# Altium PCB egg.PcbDoc (part 1 of 3)
Units mil, origin at the board's own origin, x right, y up, seen from the top; angles counter-clockwise.
Board outline 3110.24 x 2637.8 mil, 4 copper layers (Top Layer, GND, PWR, Bottom Layer), stack 30.634 mil thick; 262 components, 132 nets, 710 pads, 642 vias.
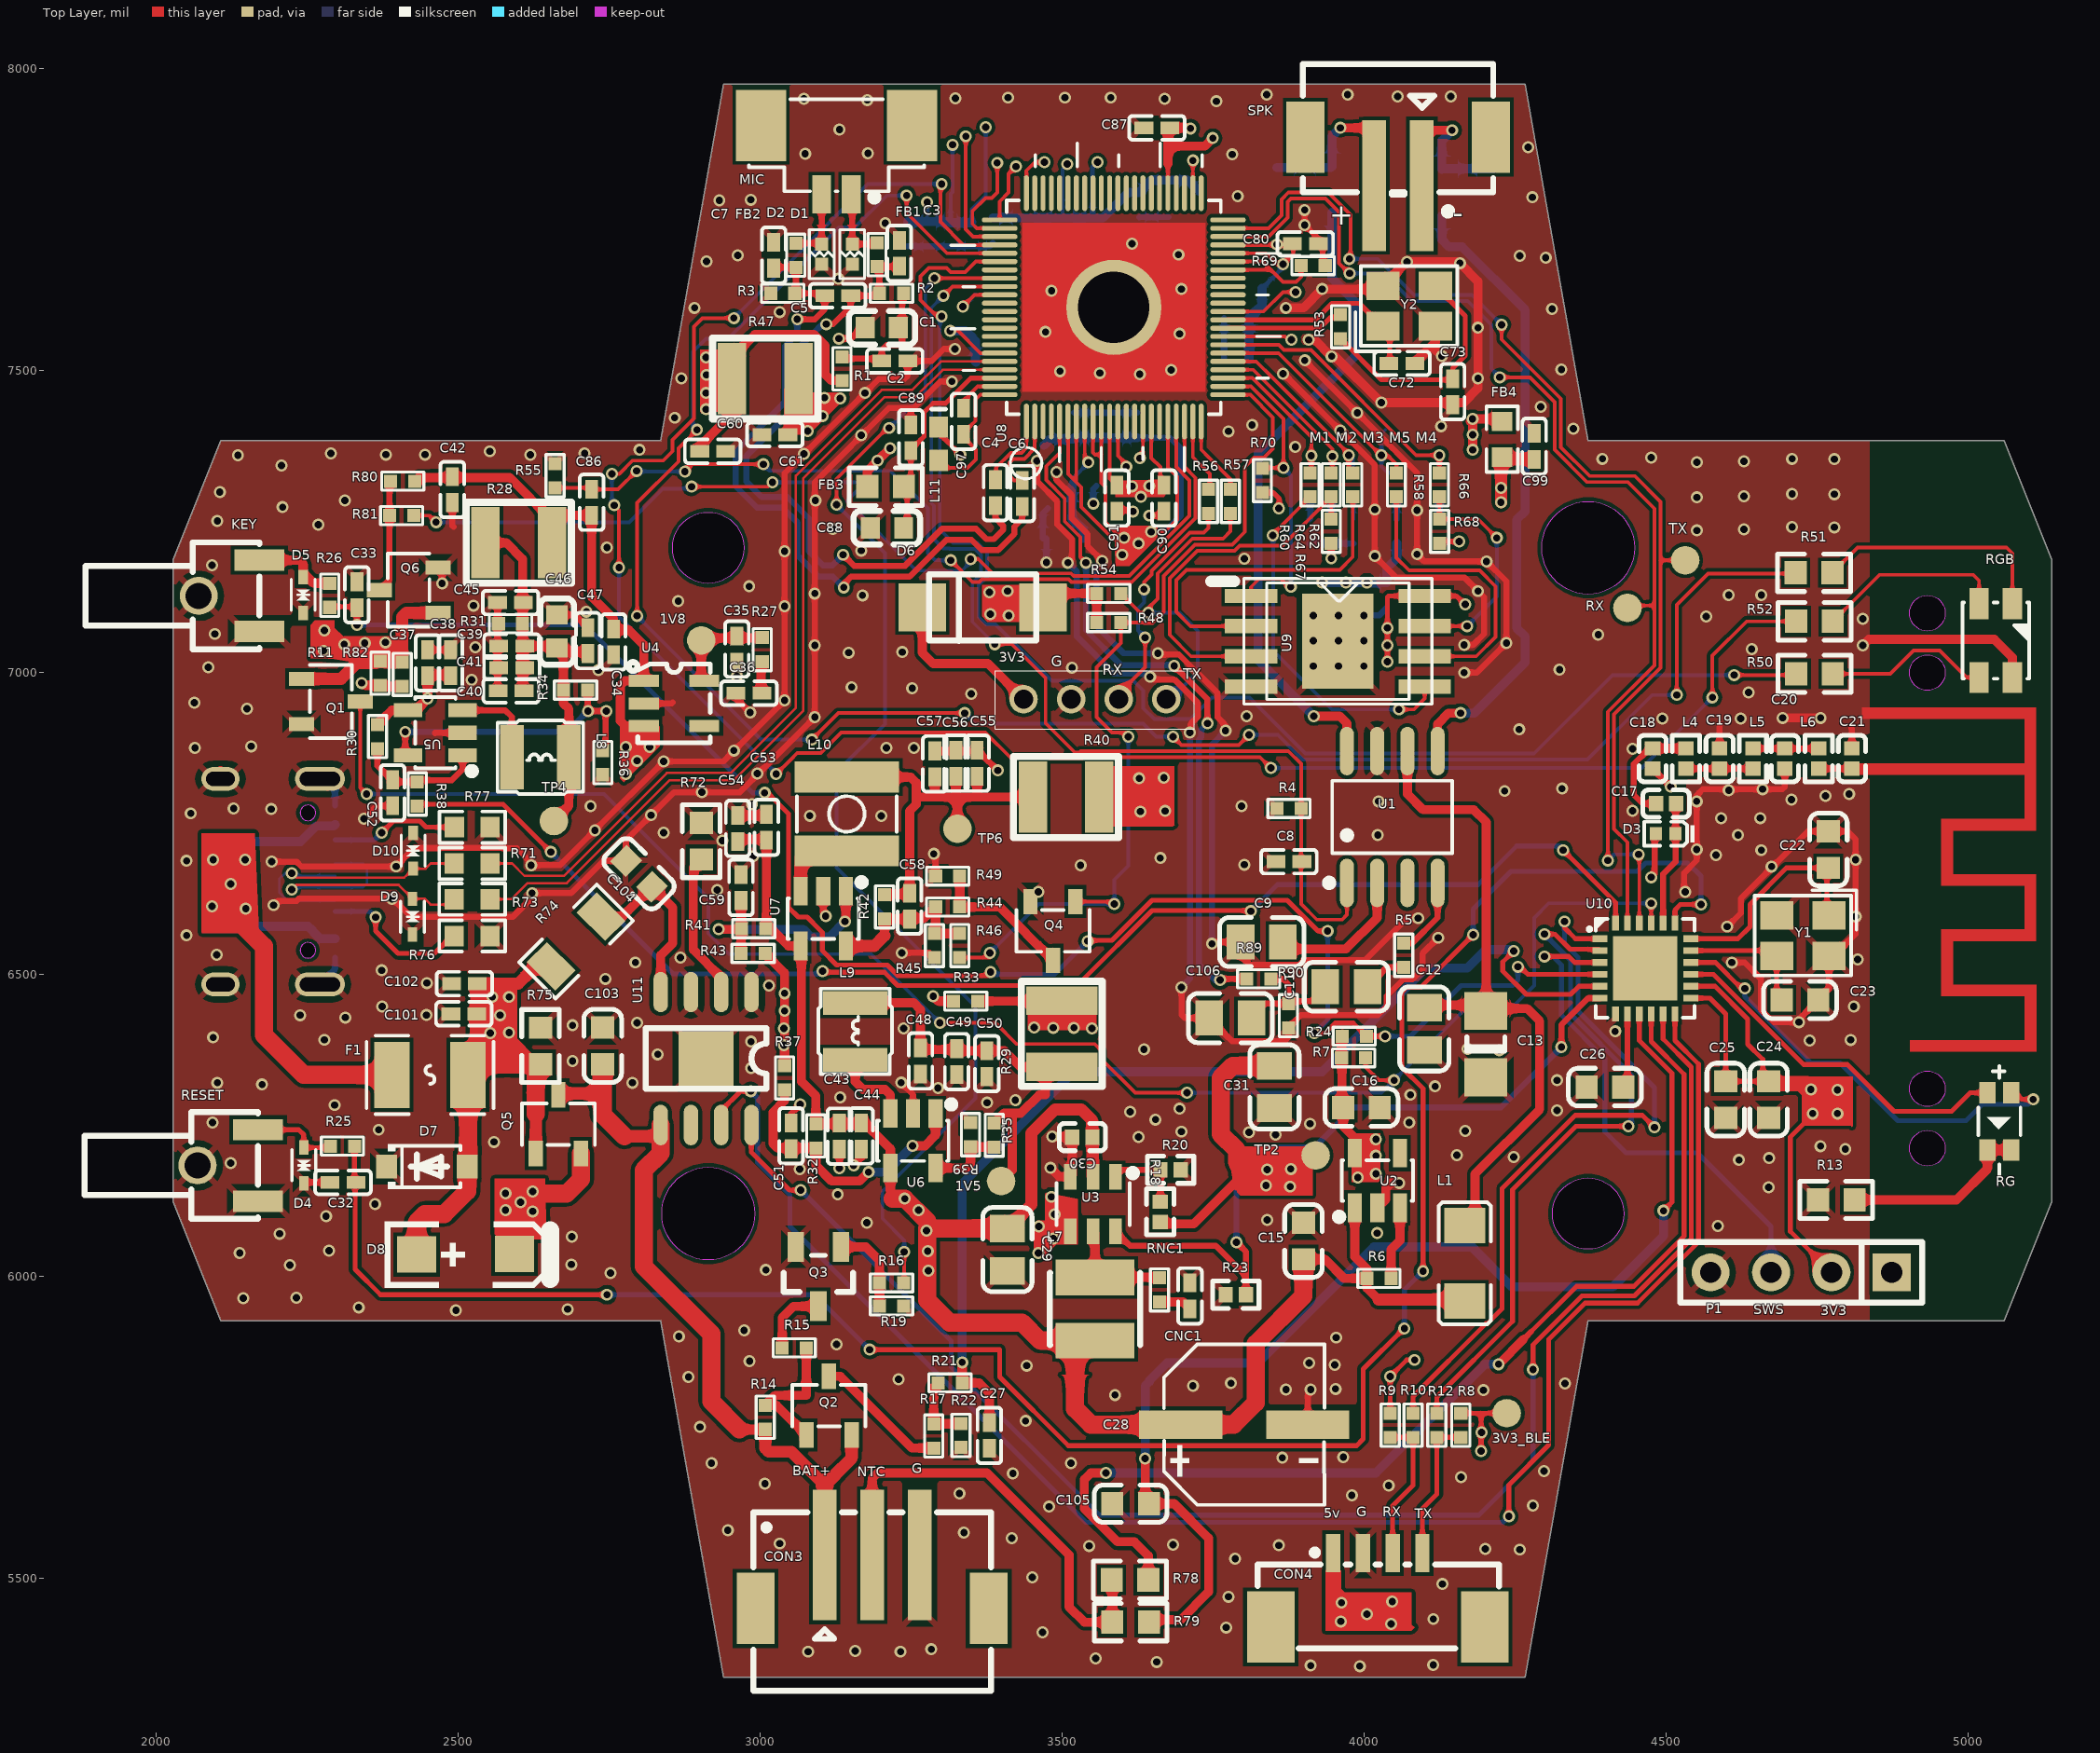
[diagram p0: Top Layer view]
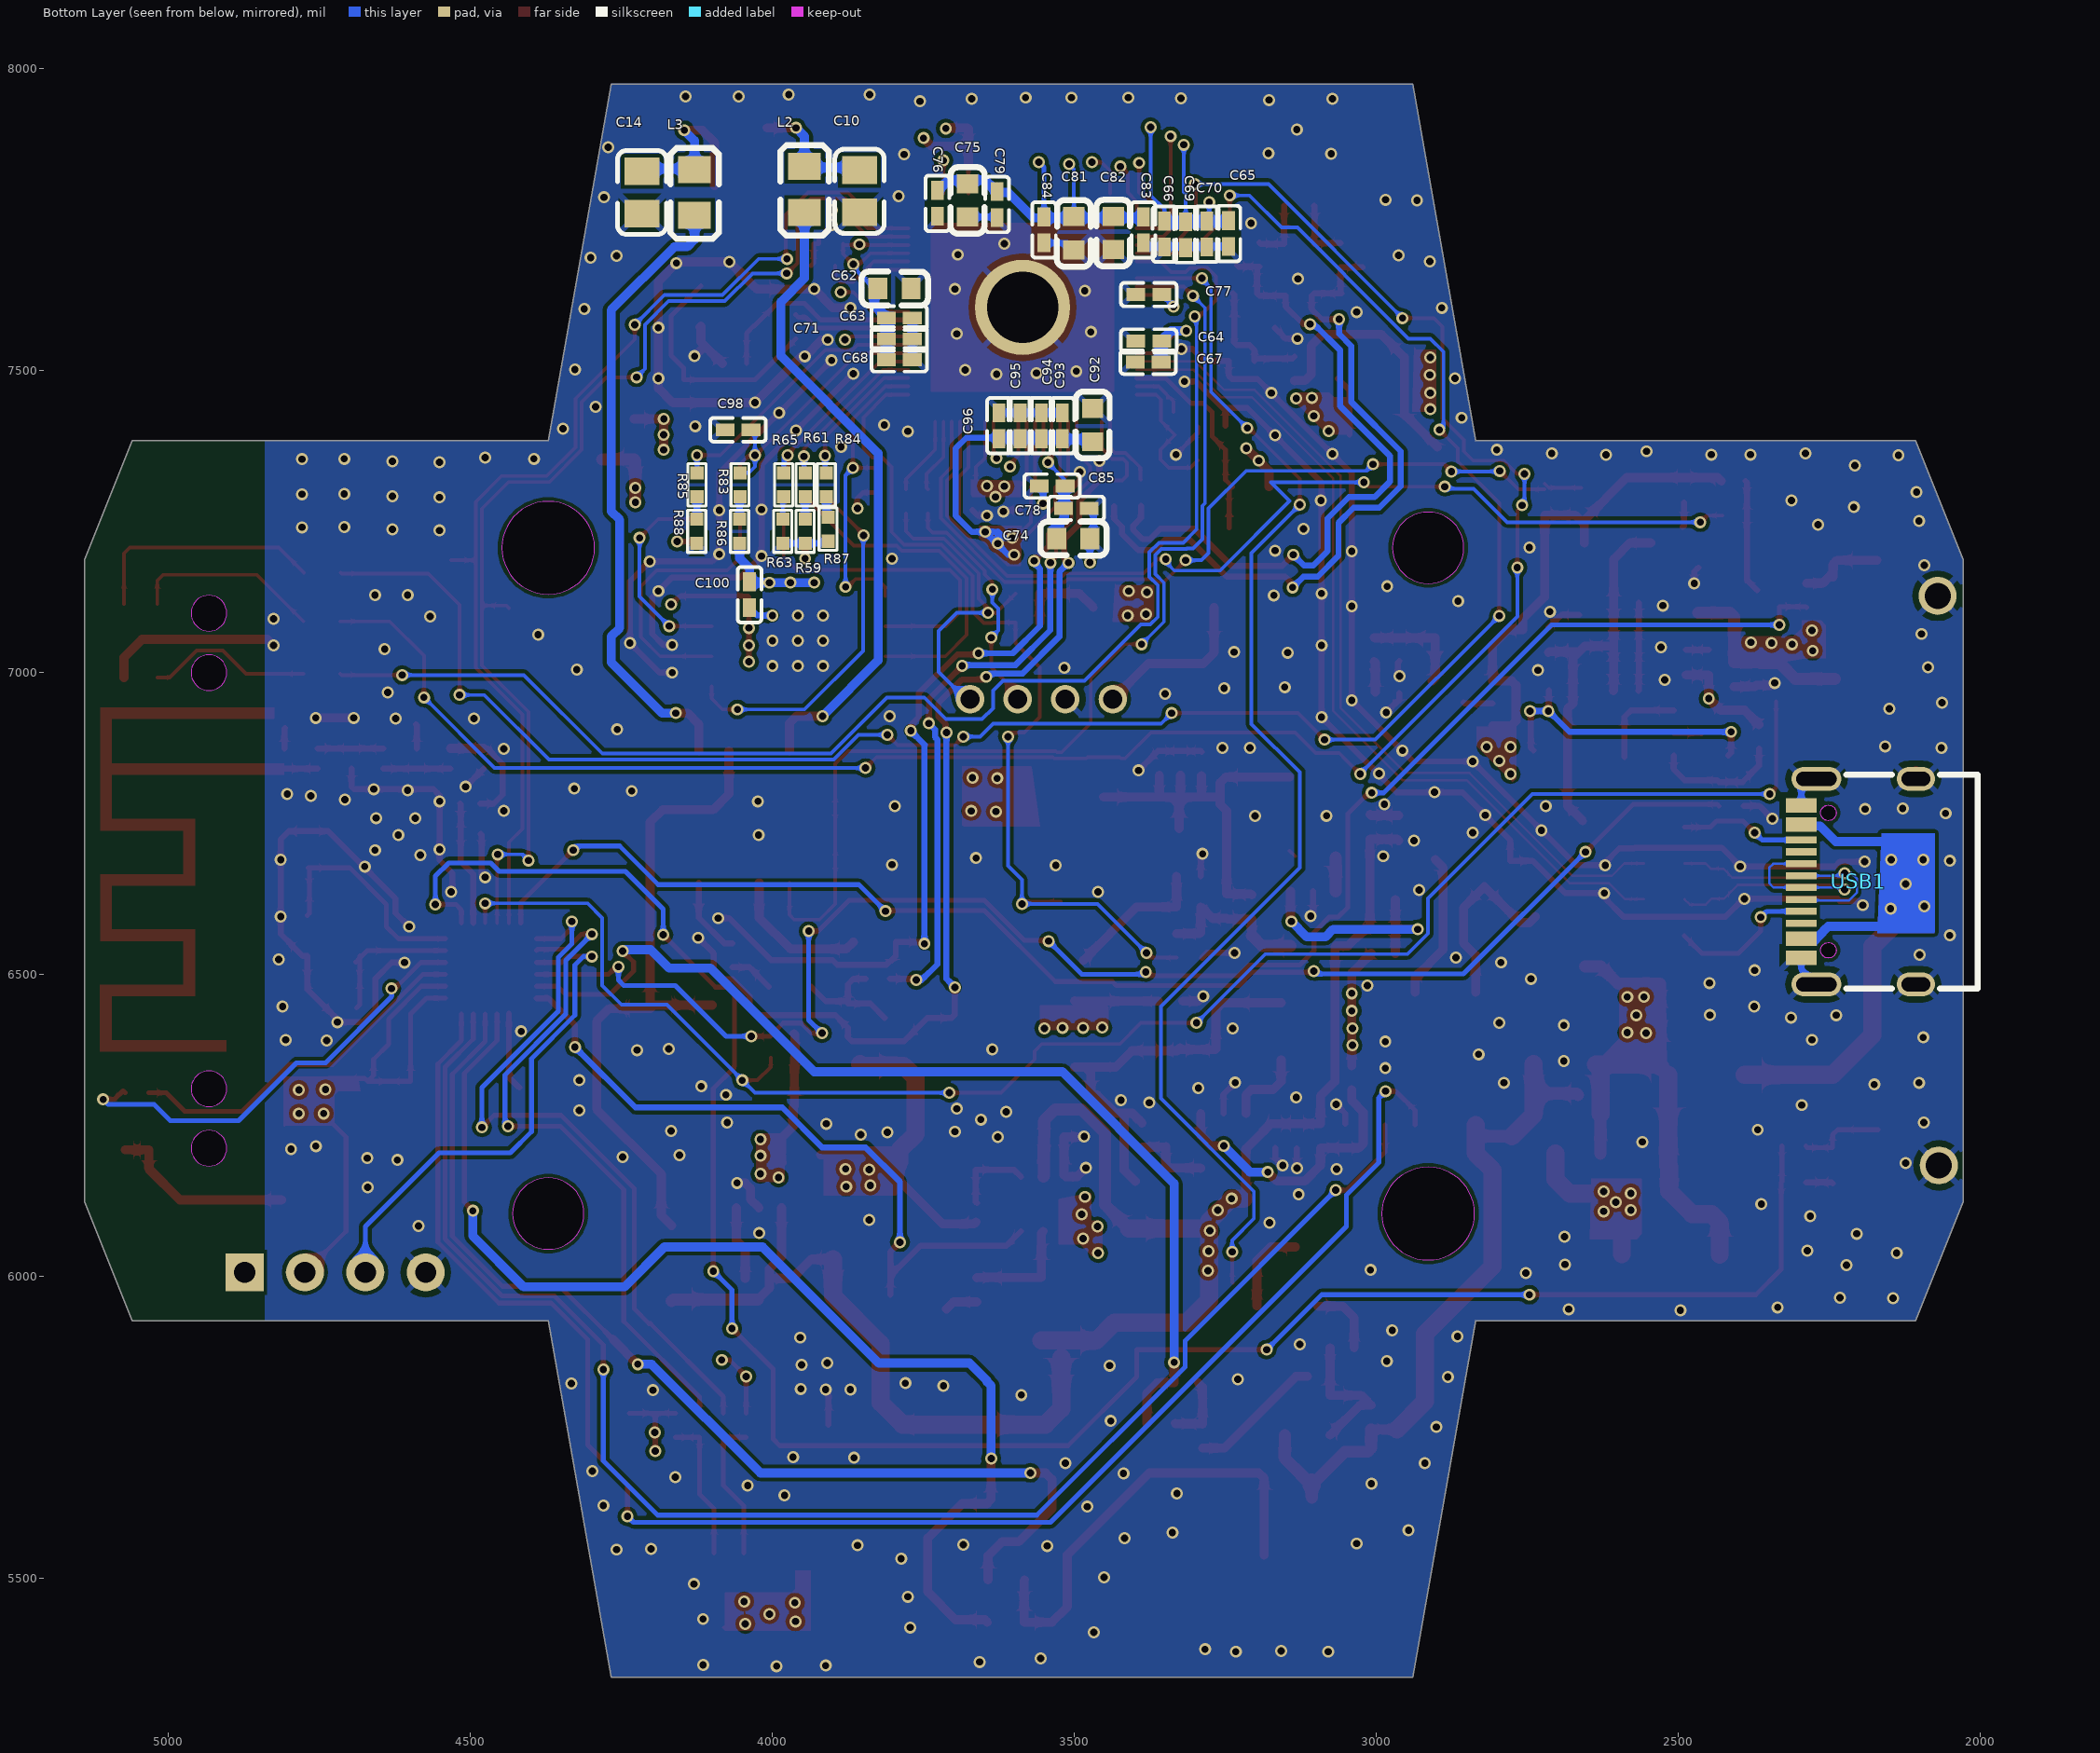
[diagram p1: Bottom Layer view, seen from below]
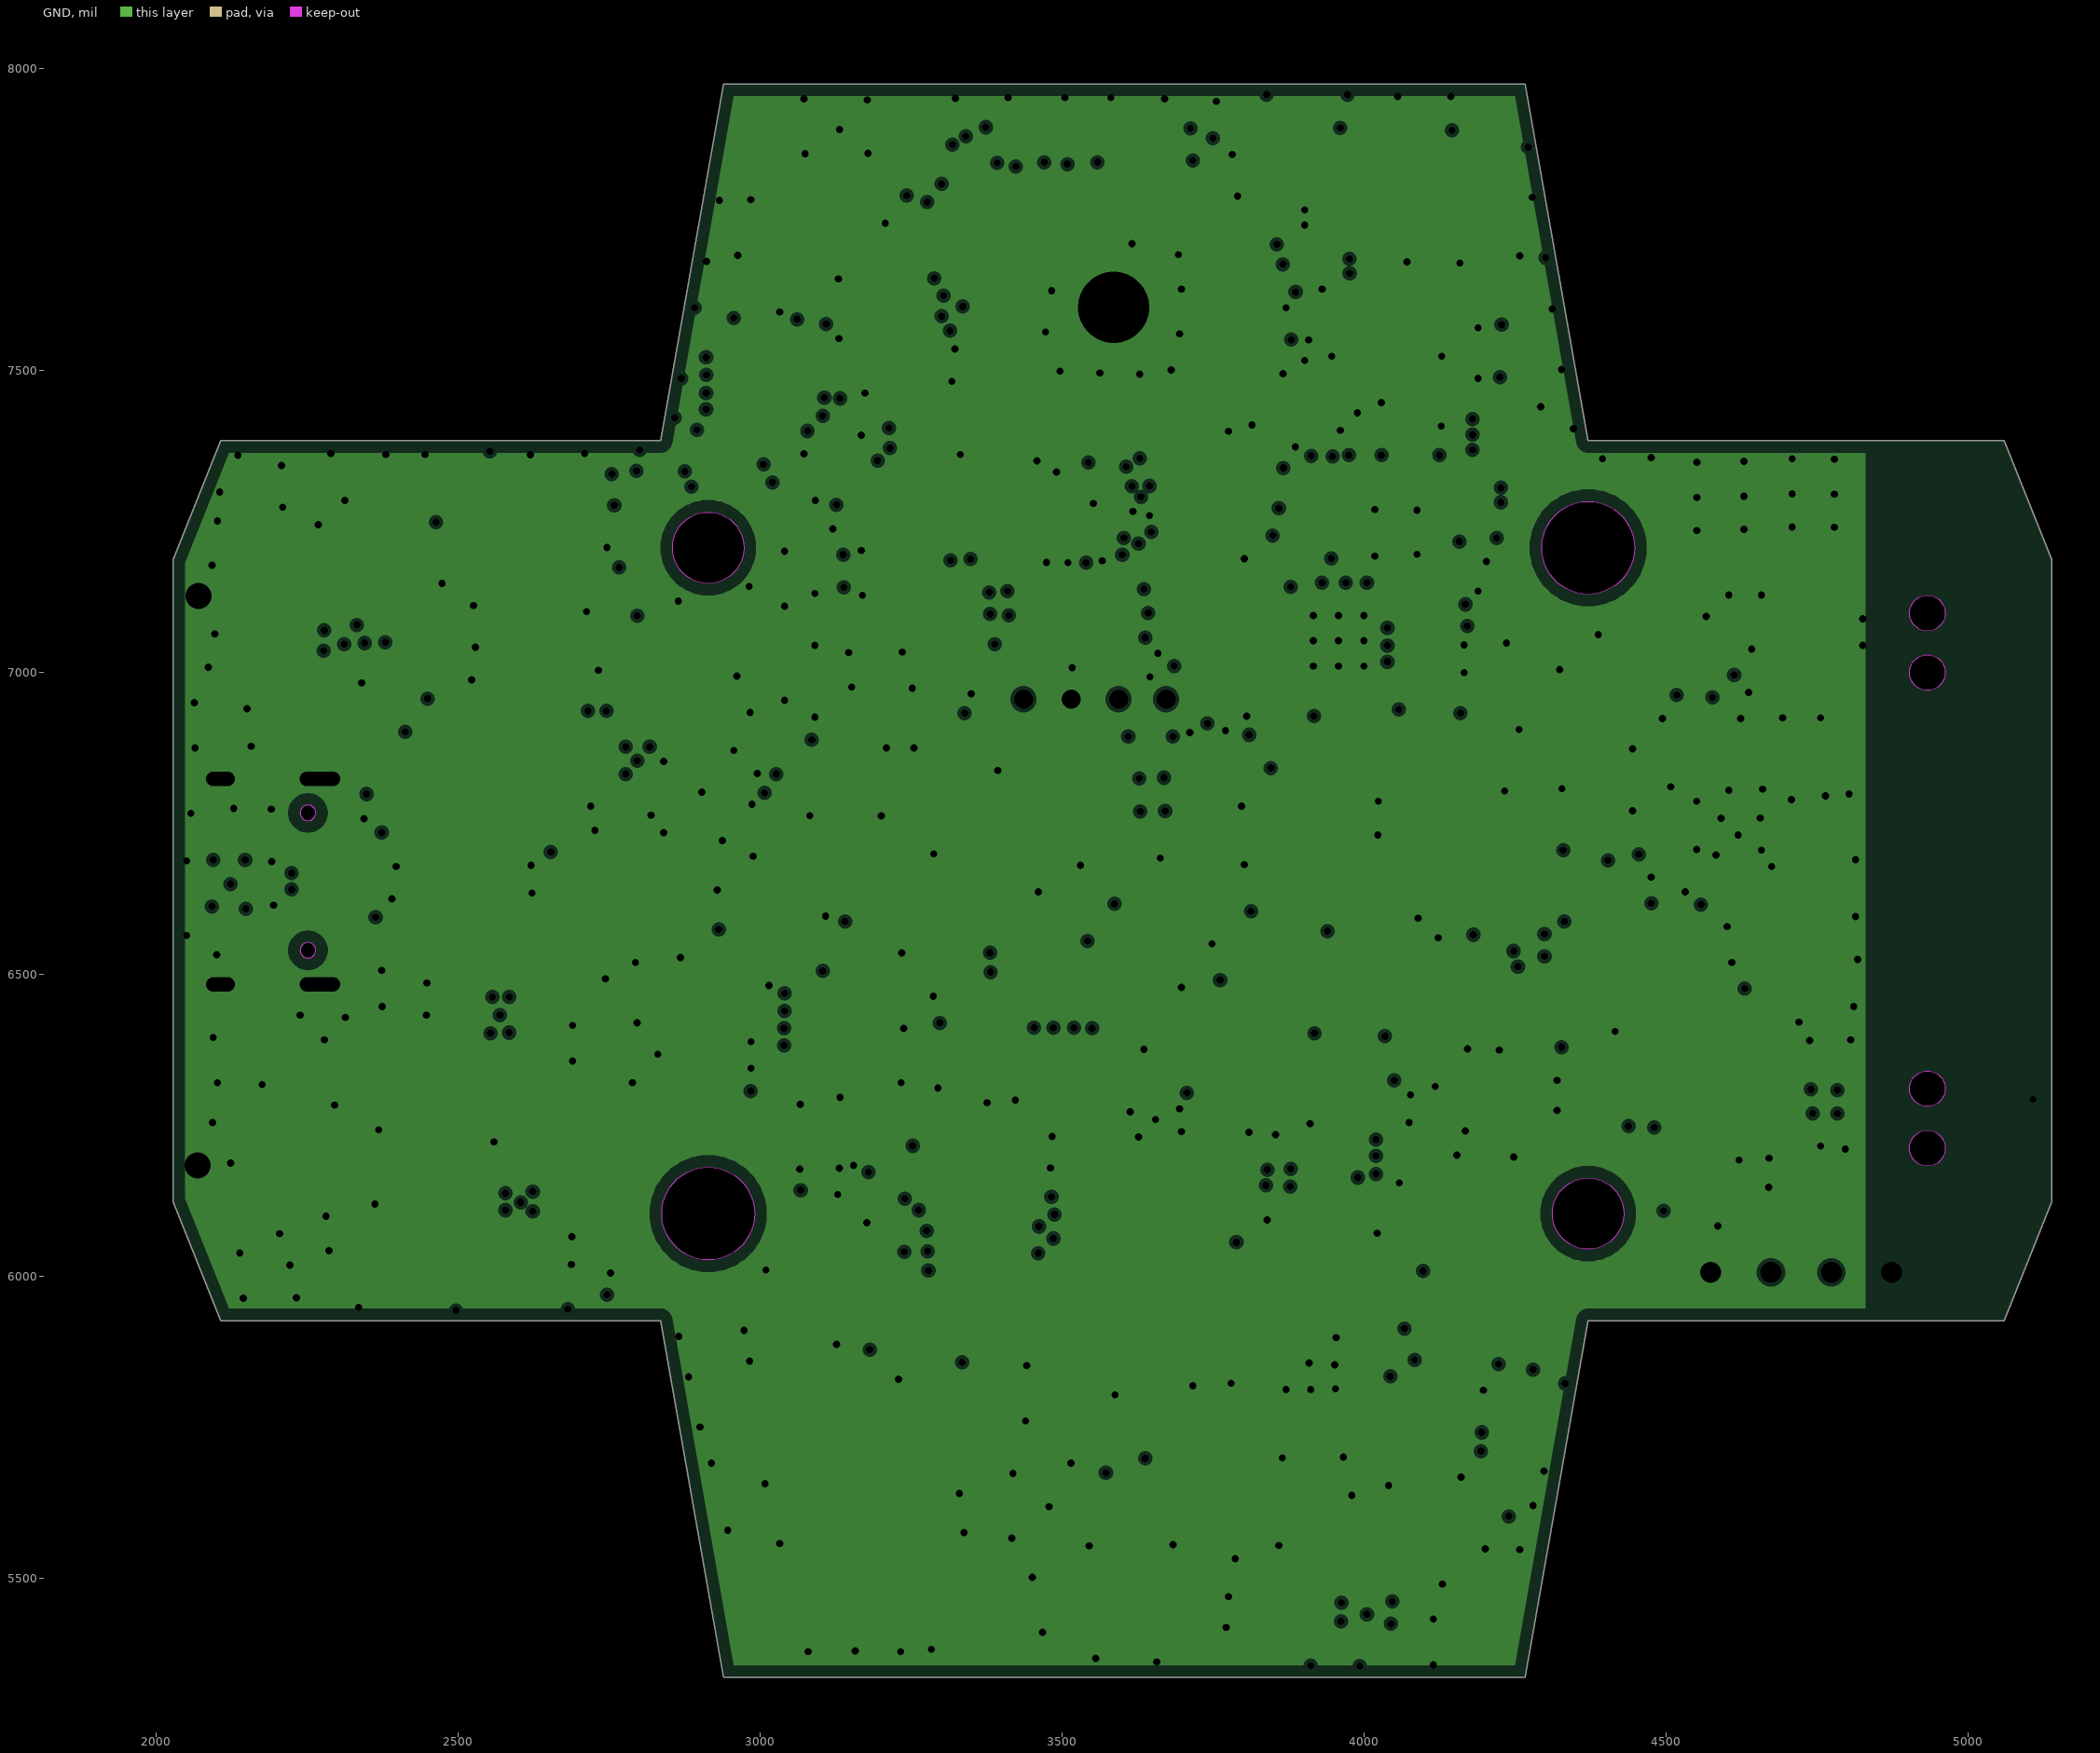
[diagram p2: GND, clearances drawn from the general rule]
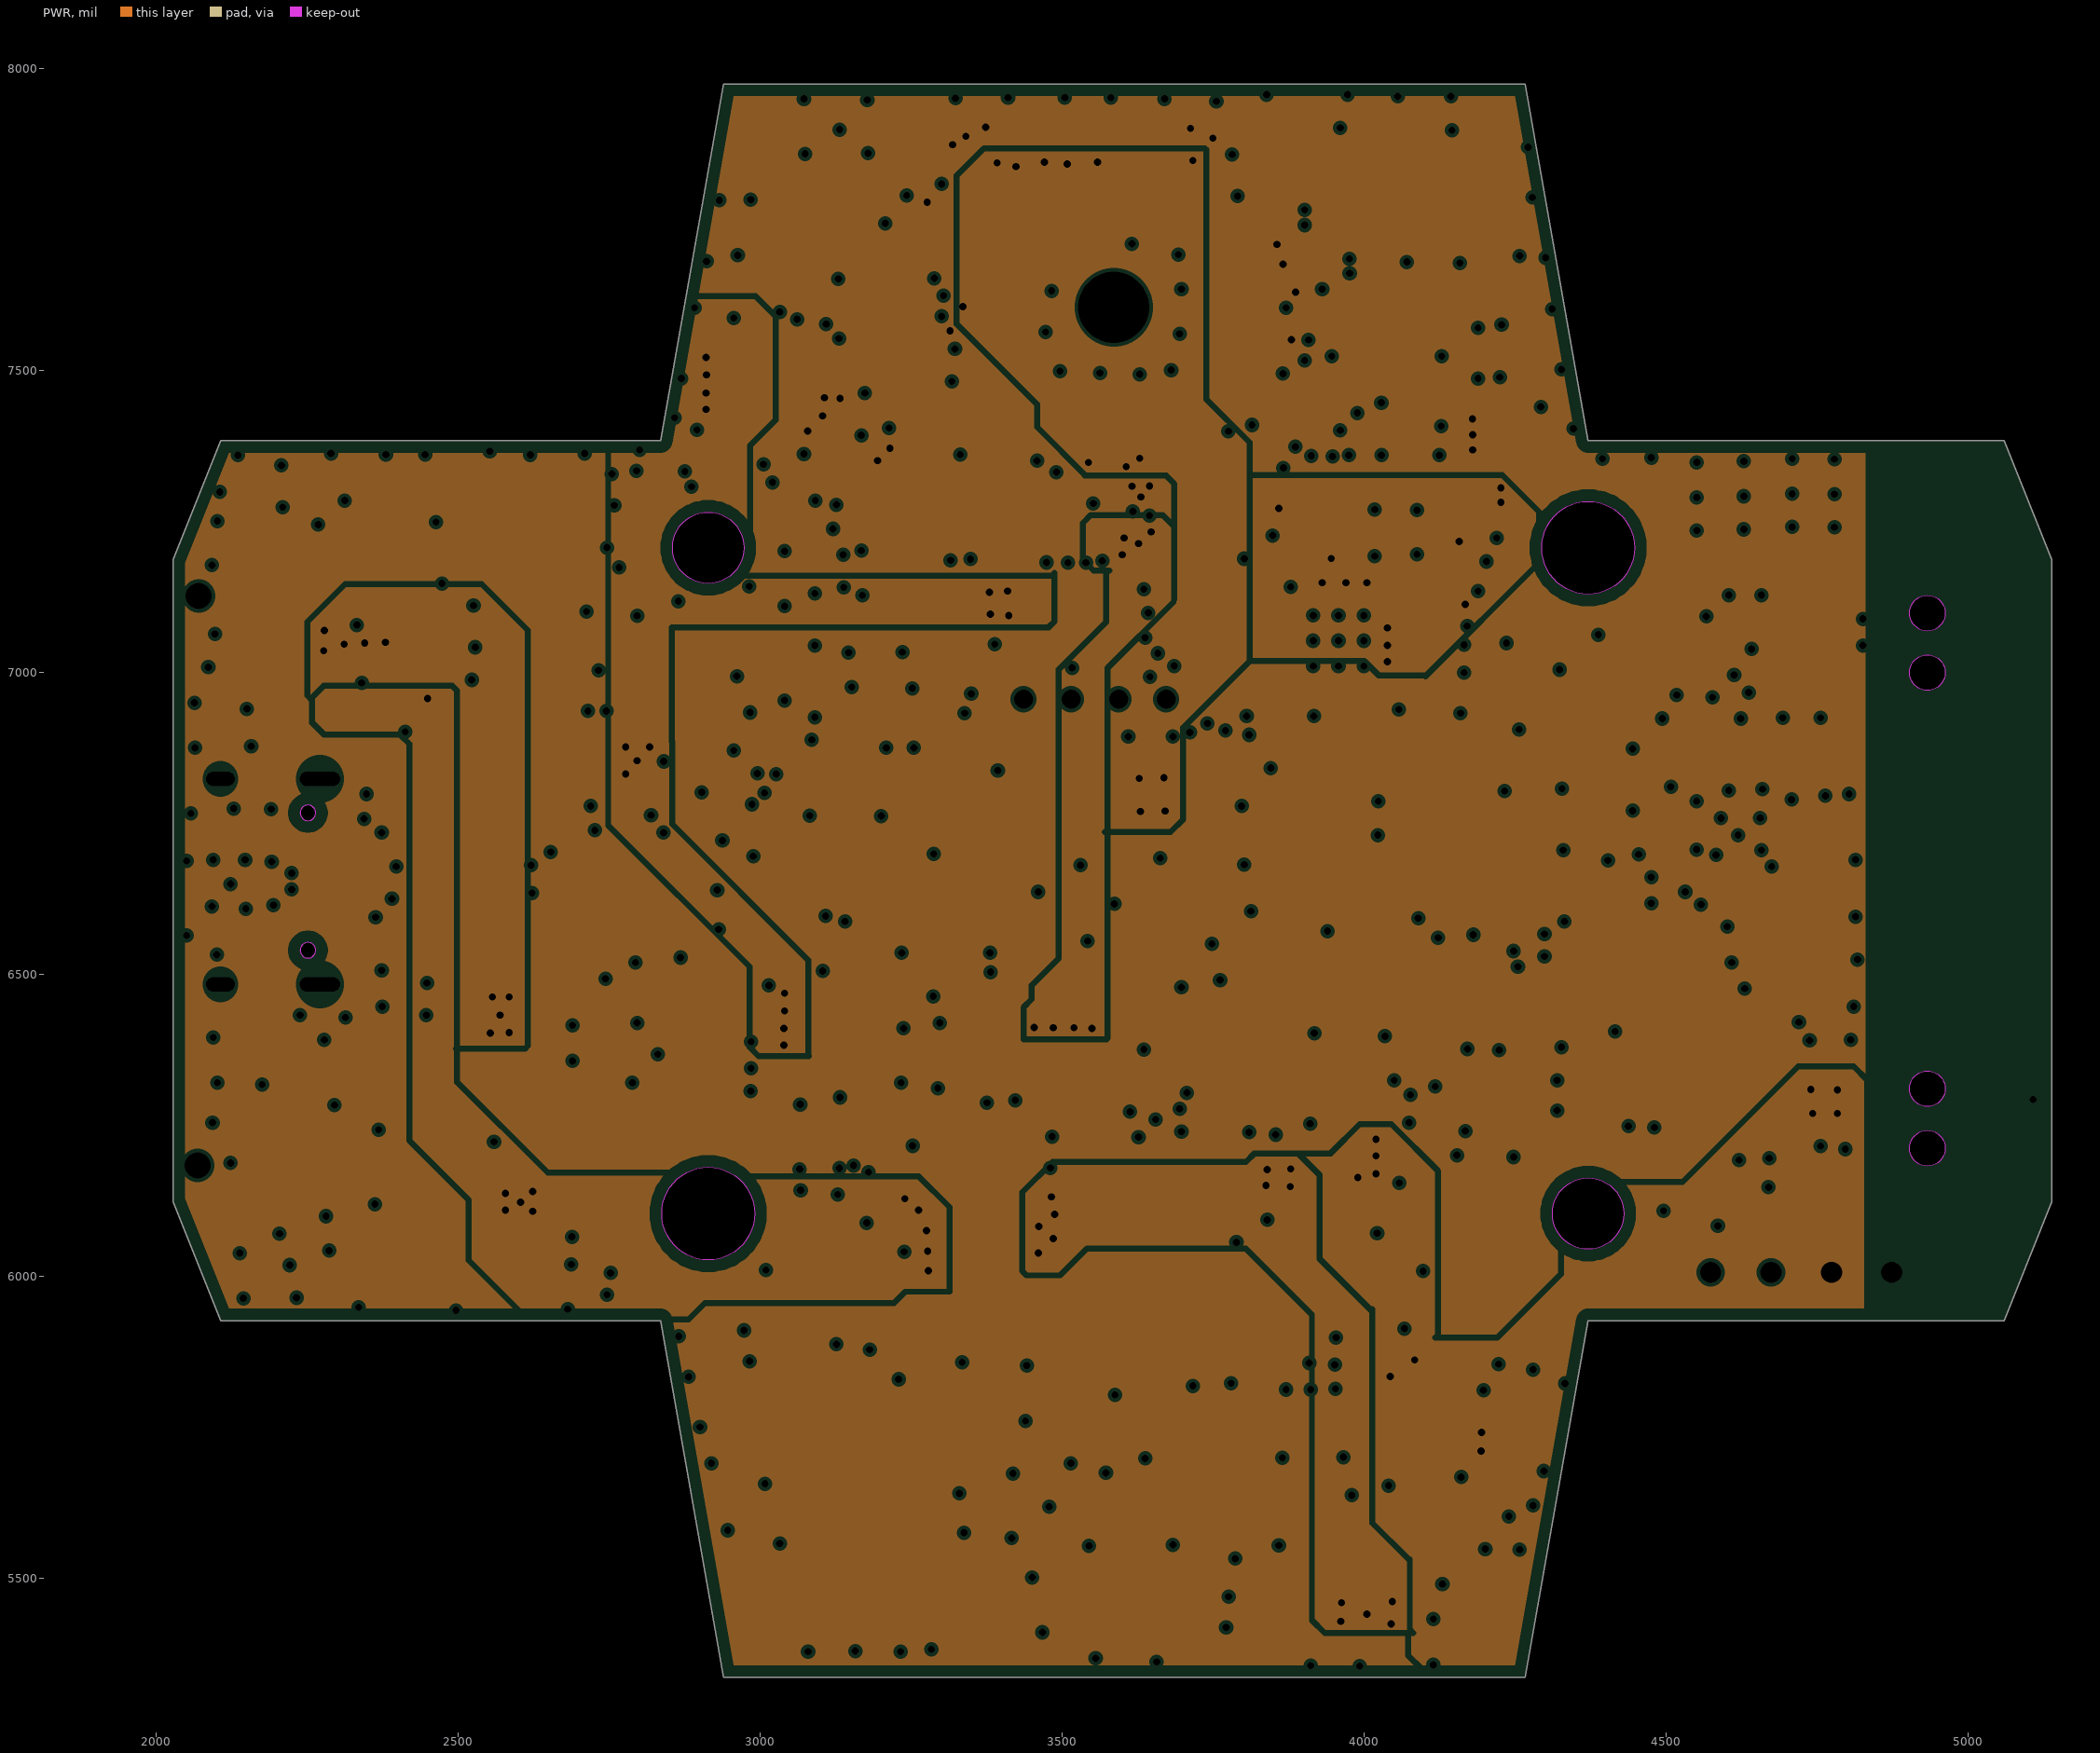
[diagram p3: PWR, clearances drawn from the general rule]

## Layer stack, top to bottom
Top Solder: solder mask 0.4, Solder Resist, Dk 3.5
Top Layer: signal copper 1.4
Dielectric1: core 10, FR-4, Dk 4.2
GND: plane copper 1.417
Dielectric5: prepreg 5, Dk 4.2
PWR: plane copper 1.417
Dielectric6: core 10, Dk 4.2
Bottom Layer: signal copper 1.4
Bottom Solder: solder mask 0.4, Solder Resist, Dk 3.5

## Board outline
2107.48,5926.15 2835.82,5926.15 2939.95,5335.6 4267.13,5335.6 4371.26,5926.15 5060.23,5926.15 5138.97,6123 5138.97,7185.99 5060.23,7382.84 4371.26,7382.84 4267.13,7973.39 2939.95,7973.39 2835.82,7382.84 2107.48,7382.84 2028.74,7185.99 2028.74,6123
cut-out: 4371.26,7128.91 cw(c4371.26,7205.68) 4294.48,7205.68 cw(c4371.26,7205.68) 4371.26,7282.45 cw(c4371.26,7205.68) 4448.03,7205.68 cw(c4371.26,7205.68)
cut-out: 4371.26,6044.26 cw(c4371.26,6103.32) 4312.2,6103.32 cw(c4371.26,6103.32) 4371.26,6162.37 cw(c4371.26,6103.32) 4430.31,6103.32 cw(c4371.26,6103.32)
cut-out: 2914.56,6026.54 cw(c2914.56,6103.32) 2837.79,6103.32 cw(c2914.56,6103.32) 2914.56,6180.09 cw(c2914.56,6103.32) 2991.34,6103.32 cw(c2914.56,6103.32)
cut-out: 2914.56,7146.62 cw(c2914.56,7205.68) 2855.51,7205.68 cw(c2914.56,7205.68) 2914.56,7264.73 cw(c2914.56,7205.68) 2973.62,7205.68 cw(c2914.56,7205.68)
cut-out: 4903.34,6998.99 cw(c4932.86,6998.99) 4932.86,7028.51 cw(c4932.86,6998.99) 4962.39,6998.99 cw(c4932.86,6998.99) 4932.86,6969.46 cw(c4932.86,6998.99)
cut-out: 4932.86,7067.88 cw(c4932.86,7097.41) 4903.34,7097.41 cw(c4932.86,7097.41) 4932.86,7126.94 cw(c4932.86,7097.41) 4962.39,7097.41 cw(c4932.86,7097.41)
cut-out: 4932.86,6182.06 cw(c4932.86,6211.58) 4903.34,6211.58 cw(c4932.86,6211.58) 4932.86,6241.11 cw(c4932.86,6211.58) 4962.39,6211.58 cw(c4932.86,6211.58)
cut-out: 4932.86,6280.48 cw(c4932.86,6310.01) 4903.34,6310.01 cw(c4932.86,6310.01) 4932.86,6339.54 cw(c4932.86,6310.01) 4962.39,6310.01 cw(c4932.86,6310.01)

## Design rules (kind name [scope] priority, off if disabled: settings)
Clearance [All] p1: gap=4 ignorepadtopadclearanceinfootprint=FALSE
ComponentClearance [All] p1: gap=0 collisioncheckmode=3 verticalgap=0 showdistances=FALSE
DiffPairsRouting DiffPairsRouting_2 [InDifferentialPair('usb_esd')] p1: maxlimit=8 minlimit=8 mostfreqgap=8 toplayer_minwidth=15 toplayer_maxwidth=15 toplayer_prefwidth=15 bottomlayer_minwidth=15 bottomlayer_maxwidth=15 bottomlayer_prefwidth=15 maxuncoupledlength=500
DiffPairsRouting DiffPairsRouting_1 [InDifferentialPair('mic')] p2: maxlimit=8 minlimit=8 mostfreqgap=8 toplayer_minwidth=15 toplayer_maxwidth=15 toplayer_prefwidth=15 bottomlayer_minwidth=15 bottomlayer_maxwidth=15 bottomlayer_prefwidth=15 maxuncoupledlength=500
DiffPairsRouting [InDifferentialPair('USB')] p3: maxlimit=8 minlimit=8 mostfreqgap=8 toplayer_minwidth=15 toplayer_maxwidth=15 toplayer_prefwidth=15 bottomlayer_minwidth=15 bottomlayer_maxwidth=15 bottomlayer_prefwidth=15 maxuncoupledlength=500
FabricationTestPointUsage TestPointUsage [All] p1: valid=0 allowmultiple=FALSE
FabricationTestpoint Testpoint [(IsPad And (OnTopLayer Or OnBottomLayer))] p1: side=3 testpointundercomponent=TRUE minsize=40 maxsize=100 preferedsize=60 minholesize=0 maxholesize=40 preferedholesize=32 testpointgrid=1 allowsidetop=TRUE allowsidebottom=TRUE usegrid=TRUE gridtolerance=0.01
HoleSize [All] p1: absolutevalues=TRUE maxlimit=120 minlimit=1 maxpercent=80.000 minpercent=20.000
MinimumSolderMaskSliver [All] p1: minsoldermaskwidth=1
PlaneClearance [All] p1: clearance=6
PlaneConnect [All] p1: planeconnectstyle=Direct reliefexpansion=20 reliefentries=4 reliefconductorwidth=10 reliefairgap=10
PolygonConnect [All] p1: thpad.connectstyle=Relief thpad.reliefconductorwidth=10 thpad.reliefentries=4 thpad.polygonreliefangle="45 Angle" thpad.airgapwidth=10 smdpad.connectstyle=Relief smdpad.reliefconductorwidth=10 smdpad.reliefentries=4 smdpad.polygonreliefangle="45 Angle" smdpad.airgapwidth=10 via.connectstyle=Direct via.reliefconductorwidth=10 via.reliefentries=4 via.polygonreliefangle="45 Angle" via.airgapwidth=10
RoutingVias [All] p1: holewidth=16 width=28 viastyle="Through Hole" minholewidth=12 minwidth=20 maxholewidth=24 maxwidth=40
SilkToSilkClearance [All] p1: silktosilkclearance=0
SilkToSolderMaskClearance SilkscreenOverComponentPads [IsPad] p1: minsilkscreentomaskgap=0 clearancetoexposedcopper=TRUE
SolderMaskExpansion [All] p1: expansion=4
Width [All] p1: maxlimit=40 minlimit=4 preferedwidth=6
20 further rules are at their usual default settings.

## Classes and differential pairs
component class USB_CHARGE: C101 C102 C103 C104 C105 CON3 D7 D8 D9 D10 F1 J2 Q5 Q6 R71 R72 R73 R74 R75 R76 R77 R78 R79 R80 R81 R82 U11 USB1
component class QFN88_FLASH_UART: 3V3 C62 C63 C64 C65 C66 C67 C68 C69 C70 C71 C72 C73 C74 C75 C76 C77 C78 C79 C80 C81 C82 C83 C84 C85 C86 C87 C88 C89 C90 C91 C92 C93 C94 C95 C96 C97 C98 C99 C100 D6 FB3 FB4 L11 LED2 R50 R51 R52 R53 R54 R55 R56 R57 R58 R59 R60 R61 R62 R63 R64 R65 R66 R67 R68 R69 R70 R83 R84 R85 R86 R87 R88 RGB U8 U9 Y2
component class POWER: 1V5 1V8 C34 C35 C36 C37 C38 C39 C40 C41 C42 C43 C44 C45 C46 C47 C48 C49 C50 C51 C52 C53 C54 C55 C56 C57 C58 C59 C60 C61 L8 L9 L10 M1 M2 M3 M4 Q4 R27 R28 R29 R30 R31 R32 R33 R34 R35 R36 R37 R38 R39 R40 R41 R42 R43 R44 R45 R46 R47 R48 R49 TP3 TP4 TP5 TP6 U4 U5 U6 U7
component class Bluetooth: 3V3_BLE *1 ANT1 C15 C16 C17 C18 C19 C20 C21 C22 C23 C24 C25 C26 C27 C28 C29 C30 C31 C32 C33 CNC1 CON4 D3 D4 D5 KEY L4 L5 L6 L7 LED1 P1 Q1 Q2 Q3 R6 R7 R8 R9 R10 R11 R12 R13 R14 R15 R16 R17 R18 R19 R20 R21 R22 R23 R24 R25 R26 RESET RGB RNC1 RX SW1 SW2 TP1 TP2 TX U2 U3 U10 Y1
component class AUDIO: C1 C2 C3 C4 C5 C6 C7 C8 C9 C10 C11 C12 C13 C14 C106 CON1 D1 D2 FB1 FB2 L1 L2 L3 mic MIC R1 R2 R3 R4 R5 R89 R90 SPK U1
net class flash_1: PM_SPI_DI PM_SPI_DO PM_SPI_HOLD PM_SPI_SCK PM_SPI_WPZ
net class flash_2: SPI_FLASH-HOLD SPI_FLASH-SCK SPI_FLASH-SDI SPI_FLASH-SDO SPI_FLASH-WPN
net class spk: SPK_OUTN SPK_OUTP
differential pair USB: +USB_DM -USB_DP
differential pair mic: +NetC3_2 -NetC5_2
differential pair usb_esd: +NetD10_2 -NetD9_2

## Components (designator, comment, footprint, x,y, rotation, side; value= is the part's Value field where it differs from the comment)
1V5 "1V5" TP 3399.34,6157.52 r90 top (schematic designator TP5)
1V8 "1V8" TP 2903.04,7053 r90 top (schematic designator TP3)
3V3 "CON4-DIP-2.0mm" "SIP4 2.0" 3389.52,6976 r0 top locked (schematic designator P2)
3V3_BLE "3v3_ble" TP 4237,5772.87 r0 top (schematic designator TP1)
C1 "10uF" C0603 3202,7570 r180 top
C2 "100nF" C0402 3223.46,7515 r0 top
C3 "33pF" C0402 3231,7693.35 r270 top
C4 "100nF" C0402 3390,7297 r90 top
C5 "1.5nF" C0402 3129,7623 r180 top
C6 "100nF" C0402 3434.45,7295.59 r90 top
C7 "33pF" C0402 3023,7690 r90 top
C8 "100nF" C0402 3876,6686 r180 top
C9 "1uF" C0805 3831,6553 r0 top
C10 "1nF" C0805 3856,7796 r90 bottom
C11 "47nF" C0805 3970.96,6479 r0 top
C12 "100nF" C0805 4100,6409 r90 top
C13 "47uF" C1206 4202,6383.82 r90 top
C14 "1nF" C0805 4216,7794 r90 bottom
C15 "1uf" 0603_C 3900,6058 r270 top
C16 "10uF" 0603_C 3996,6279 r180 top value=10nF
C17 "220pF" 0402_C 4500.27,6782 r180 top
C18 "NC" 0402_C 4478,6856.73 r90 top
C19 "NC" 0402_C 4589,6856.73 r270 top
C20 "NC" 0402_C 4697,6856.73 r90 top
C21 "NC" 0402_C 4808,6856.73 r270 top
C22 "12PF" 0603_C 4769,6706 r270 top
C23 "12PF" 0603_C 4722,6457 r180 top
C24 "1UF" 0603_C 4670,6292 r270 top
C25 "1UF" 0603_C 4599,6292 r270 top
C26 "1UF" 0603_C 4399,6312.92 r0 top
C27 "100nF" C0402 3380,5736 r90 top
C28 "100uF/25V" "SMD 6.3*5.4 电解" 3808,5753 r0 top value=220uF
C29 "22UF" 0805_C 3410,6043.68 r90 top
C30 "1UF" 0402_C 3534,6230 r0 top
C31 "22UF" 0805_C 3852,6313 r90 top
C32 "100nF" C0402 2310,6155 r0 top
C33 "100nF" C0402 2333,7128 r270 top
C34 "10uF" C0402 2758,7049.9 r90 top
C35 "10uF" C0402 2962,7038 r90 top
C36 "100nF" C0402 2982,6965 r0 top
C37 "10uF" C0402 2450.05,7015.26 r270 top
C38 "100nF" C0402 2488.05,7015.23 r270 top
C39 "22uF" C0402 2589.32,7042.98 r0 top
C40 "10uF" C0402 2588.32,6968.98 r0 top
C41 "100nF" C0402 2589.32,7006.98 r0 top
C42 "100nF" C0402 2491,7302 r270 top
C43 "10uF" C0402 3131.83,6231.6 r90 top
C44 "100nF" C0402 3167.83,6231.82 r90 top
C45 "22uF" C0402 2587.32,7114.98 r0 top
C46 "10uF_10V" C0603 2664.32,7067.19 r90 top
C47 "100nF" C0402 2715.32,7051.98 r90 top
C48 "22uF" C0402 3266,6356 r90 top
C49 "10uF" C0402 3326,6355 r90 top
C50 "100nF" C0402 3376,6351.54 r270 top
C51 "100nF" C0402 3051.83,6231.98 r270 top
C52 "100nF" C0402 2392,6800 r90 top
C53 "10uF" C0402 3011,6743 r270 top
C54 "100nF" C0402 2963.5,6741 r270 top
C55 "22uF" C0402 3359.68,6849 r270 top
C56 "22uF" C0402 3324.68,6849 r270 top
C57 "100nF" C0402 3289.68,6848 r270 top
C58 "47pF" C0402 3248,6612.4 r270 top
C59 "220nF" C0402 2968.85,6643.16 r270 top
C60 "100nF" C0402 2922,7365.46 r0 top
C61 "100nF" C0402 3025,7393 r180 top
C62 "10uF" C0603 3798,7635 r0 bottom locked
C63 "100nF" C0402 3790,7586 r180 bottom locked
C64 "100nF" C0402 3377,7548 r0 bottom locked
C65 "100nF" C0402 3245,7726 r270 bottom
C66 "100nF" C0402 3351,7725 r270 bottom locked
C67 "100nF" C0402 3378,7513 r0 bottom locked
C68 "100nF" C0402 3790,7517 r180 bottom locked
C69 "100nF" C0402 3316,7724 r270 bottom locked
C70 "100nF" C0402 3281,7725 r270 bottom
C71 "100nF" C0402 3790,7551.31 r180 bottom locked
C72 "18pF" C0402 4063,7511 r180 top
C73 "18pF" C0402 4147,7464.02 r90 top
C74 "10uF" C0603 3502,7221 r0 bottom locked
C75 "10uF" C0603 3677,7781 r90 bottom locked
C76 "100nF" C0402 3727,7776 r270 bottom locked
C77 "100nF" C0402 3377,7625 r0 bottom locked
C78 "100nF" C0402 3497,7271 r180 bottom locked
C79 "100nF" C0402 3628,7774 r270 bottom locked
C80 "100nF" C0402 3903.09,7709 r180 top
C81 "10uF" C0603 3501,7726.46 r90 bottom locked
C82 "10uF" C0603 3436,7727 r90 bottom locked
C83 "100nF" C0402 3386,7732 r270 bottom locked
C84 "100nF" C0402 3550.54,7732 r270 bottom locked
C85 "100nF" C0402 3537,7308 r0 bottom
C86 "2.2uF" C0402 2721.63,7281 r90 top
C87 "100nF" C0402 3657.32,7901 r0 top
C88 "10uF" C0603 3210.54,7238.87 r0 top
C89 "100nF" C0402 3250,7387.81 r90 top
C90 "100nF" C0402 3669,7288 r90 top
C91 "1uF" C0402 3591,7288 r90 top
C92 "10uF" C0603 3470,7408.81 r270 bottom locked
C93 "100nF" C0402 3520,7407.81 r90 bottom locked
C94 "100nF" C0402 3555,7407.81 r90 bottom locked
C95 "100nF" C0402 3590,7407.81 r90 bottom locked
C96 "100nF" C0402 3625,7407.81 r90 bottom locked
C97 "10uF" C0402 3337.19,7415.12 r270 top
C98 "NC/100nF" C0402 4057,7401 r180 bottom
C99 "100nF" C0402 4282,7373.65 r90 top
C100 "100nF" C0402 4038,7128 r270 bottom
C101 "100nF" C0402 2510,6434 r180 top
C102 "10uF" C0402 2511,6484 r180 top
C103 "10uf" 0603_C 2740,6381 r90 top value=10nF
C104 "10UF" 0603_C 2800,6666 r315 top
C105 "100nF" 0603_C 3613.88,5623 r0 top
C106 "1nF" C0805 3778.96,6427 r180 top
CNC1 "NC" c0402 3712,5967 r270 top value=100nF
CON3 "BX-PH2.0-3PZZ" CONN-SMD_2.0-3PLT 3223.41,5488.27 r180 top
CON4 "Ultra" CONN-SMD_4P-P1.25_LT 4023,5480 r0 top locked
D1 "DCE0510D2" D0402_0.55X0.6 3153,7692 r90 top
D2 "DCE0510D2" D0402_0.55X0.6 3102.39,7692 r90 top
D3 "SE6V3LHN102T 6.3v单向" 0402-D 4497,6727 r180 top
D4 "LESD5Z5.0CT1G" SOD-523_L1.2-W0.8-LS1.6-BI 2245,6183.1 r90 top
D5 "LESD5Z5.0CT1G" SOD-523_L1.2-W0.8-LS1.6-BI 2244,7127.48 r90 top
D6 "SS24" DO-214AC 3369,7107 r0 top
D7 "SMF6.0A" SOD-123 2468,6187 r0 top
D8 "SS34" SMA 2489,6032.39 r180 top
D9 "LESD5Z5.0CT1G" SOD-523_L1.2-W0.8-LS1.6-BI 2425,6595 r90 top
D10 "LESD5Z5.0CT1G" SOD-523_L1.2-W0.8-LS1.6-BI 2426,6704 r270 top
F1 "6V 4A" F1210 2453.99,6333 r0 top
FB1 "0R" R0402 3194,7691 r270 top
FB2 "0R" R0402 3059.6,7690 r270 top
FB3 "FB120R" 0603_R 3208.31,7306.87 r0 top
FB4 "FB120R" R0603 4229,7385.46 r90 top
KEY "OnOff" SMD-KEY-3 2116,7141 r270 top (schematic designator SW2)
L1 "600R" L1206 4167,6021 r90 top
L2 "1K 0.5A" L0805 3947,7799 r90 bottom
L3 "1K 0.5A" L0805 4129,7794 r90 bottom
L4 "0R" 0402_R 4533,6856.73 r270 top
L5 "0R" 0402_R 4644,6856.73 r90 top
L6 "0R" 0402_R 4753,6856.73 r270 top
L7 "SLW3012P1R5MST SMD3.0*3.0" IND-SMD_L3.0-W3.0 3570,5988 r90 top
L8 "2.2uH/1A" SWPA3015S 2636.76,6859 r0 top
L9 "2.2uH/1A" SWPA3015S 3158,6405 r90 top
L10 "2.2uH/2.7A" L-MLPS-4018 3144,6765 r0 top
L11 "FB60R/300mA" L0603 3296,7378 r270 top
MIC "MK" CONN-SMD_2P-P1.25-LT 3127,7848 r180 top (schematic designator CON1)
P1 "DEBUG" SIP4-2.54 4874,6006 r180 top
Q1 "2N7002" SOT-23 2269.6,6942.74 r180 top
Q2 "SI2301 P" SOT-23 3123,5765 r270 top
Q3 "S8050" SOT-23(SOT-23-3) 3097,5999 r90 top
Q4 "2N7002" SOT-23 3476.74,6591.6 r90 top
Q5 "CJ3401" SOT-23 2675,6231 r270 top
Q6 "2N7002" SOT-23 2439,7144 r0 top
R1 "4K7" R0402 3136,7502 r90 top
R2 "2K" R0402 3218,7627 r180 top
R3 "2K" R0402 3038,7627 r180 top
R4 "10K" R0402 3876,6774 r180 top
R5 "12K" R0402 4066,6531 r90 top value=30K
R6 "10k" R0402 4025,5996 r0 top value=120R
R7 "10K" R0402 3983,6361.13 r0 top
R8 "10K" R0402 4160.51,5752.87 r270 top value=100R
R9 "10K" R0402 4043.7,5752.87 r270 top value=100R
R10 "100R" R0402 4081.51,5752.87 r270 top
R11 "47K" R0402 2371.37,6998 r270 top
R12 "100R" R0402 4120.7,5752.87 r270 top
R13 "1K" 0603_R 4782,6126 r0 top
R14 "560K" R0402 3009,5766 r90 top
R15 "1K" R0402 3057,5881 r180 top
R16 "1K" R0402 3218.13,5988.51 r0 top value=120R
R17 "560K" R0402 3288,5735 r90 top
R18 "470k" 0402_R 3663,6106.22 r270 top value=120R
R19 "10K" R0402 3218.13,5950.35 r180 top value=120R
R20 "150k" 0402_R 3680,6176 r0 top value=120R
R21 "1K" R0402 3315,5823 r180 top
R22 "100K" R0402 3333,5736 r270 top
R23 "1M" 0402_R 3788,5969 r0 top value=120R
R24 "10K" R0402 3984,6397 r180 top
R25 "100R" R0402 2309,6215 r0 top
R26 "100R" R0402 2288,7127 r270 top
R27 "0R" R0402 3004,7037 r270 top
R28 "0R" R1210 2601,7214 r0 top
R29 "0R" R1210 3500,6401 r90 top
R30 "NC/100K" R0402 2367,6893 r90 top
R31 "NC/10K" R0402 2587.32,7079.98 r180 top
R32 "NC/100K" R0402 3092.83,6231.98 r90 top
R33 "1K/NC" R0402 3341,6455 r180 top
R34 "150K/1%" R0402 2695,6970 r0 top
R35 "15K/1%" R0402 3388,6233 r270 top
R36 "33K/1%" R0402 2740,6850 r90 top
R37 "100K" R0402 3041,6328 r90 top
R38 "100K" R0402 2433,6798 r270 top
R39 "10K/1%" R0402 3348.87,6234 r270 top
R40 "0R" R1210 3507,6793 r0 top
R41 "NC/100K" R0402 2990,6575 r0 top
R42 "10K/1%" R0402 3206.6,6611 r270 top
R43 "100K" R0402 2989,6534 r180 top
R44 "60.4K/1%" R0402 3311,6611 r180 top
R45 "20K/1%" R0402 3289,6547 r90 top
R46 "NC/0R" R0402 3331,6547 r90 top
R47 "0R" R1210 3009,7486 r0 top
R48 "4K7" R0402 3577.63,7082 r180 top
R49 "NC" R0402 3311,6662 r0 top
R50 "1k" 0603_R 4746,6997 r180 top
R51 "1k" 0603_R 4745.32,7164.33 r180 top
R52 "1k" 0603_R 4746,7083.87 r180 top
R53 "22R" R0402 3961.31,7571.53 r90 top
R54 "4K7" R0402 3577.63,7130 r0 top
R55 "20K" R0402 2661,7324.97 r90 top
R56 "100R" R0402 3742.7,7282.45 r90 top
R57 "100R" R0402 3779,7282.45 r90 top
R58 "0R" R0402 4053.85,7309.87 r270 top
R59 "3K3" R0402 3945.97,7233 r270 bottom
R60 "0R" R0402 3911.02,7309.87 r270 top
R61 "0R" R0402 3945.97,7309.87 r90 bottom
R62 "0R" R0402 3981.51,7309.87 r270 top
R63 "3K3" R0402 3983,7233 r270 bottom
R64 "0R" R0402 3945.97,7309.87 r270 top
R65 "0R" R0402 3981.51,7309.87 r90 bottom
R66 "0R" R0402 4125,7309.87 r270 top
R67 "NC/10K" R0402 3945.97,7233 r90 top
R68 "NC/10K" R0402 4125.49,7233 r90 top
R69 "1M" R0402 3916,7673 r180 top
R70 "10K" R0402 3832,7317 r90 top
R71 "2.2R" R0603 2523.79,6683 r0 top
R72 "1.3k" 0603_R 2903.04,6720 r270 top
R73 "2.2R" R0603 2523.79,6623.86 r0 top
R74 "R250" 1206_R 2692.65,6548.51 r225 top
R75 "10K" 0603_R 2637,6380.69 r270 top value=120R
R76 "5.1K" R0603 2523.79,6563 r0 top
R77 "5.1K" R0603 2524,6743 r0 top
R78 "10K" 0603_R 3612.87,5496.82 r180 top
R79 "1K" 0603_R 3613.87,5426.82 r0 top
R80 "4.7K" R0402 2409,7316 r180 top
R81 "0R" R0402 2407,7259 r180 top
R82 "47K" R0402 2408,6996 r270 top
R83 "0R" R0402 4053.85,7309.87 r90 bottom
R84 "0R" R0402 3911.02,7309.87 r90 bottom
R85 "0R" R0402 4125,7309.87 r90 bottom
R86 "3K3" R0402 4054.35,7233 r270 bottom
R87 "3K3(NC)" R0402 3908,7236.54 r270 bottom
R88 "3K3(NC)" R0402 4125.49,7233 r270 bottom
R89 "0R" R0402 3825.84,6492 r0 top
R90 "470K" R0402 3875.08,6431 r270 top
RESET "Reset" SMD-KEY-3 2114,6198 r270 top (schematic designator SW1)
RG "*" LED-SMD_4P-L3.2-W1.6-TL_XL-3216SURUGC 5052,6256 r270 top (schematic designator LED1)
RGB "XL-A3528RGBC-BM" LED-ARRAY-SMD_4P-L3.2-W2.8-LS3.5-BL_XL-A3528RGBC-BM 5046,7052 r90 top (schematic designator LED2)
RNC1 "NC" R0402 3661.81,5977 r90 top value=100R
RX "RXSOC" TP 4436.17,7106.52 r90 top (schematic designator TP_M2)
SPK "SPK" CONN-SMD_2.0-2PLT 4064.59,7869.73 r0 top locked (schematic designator CON2)
TP2 "5V" TP 3920,6200.28 r90 top
TP4 "3V3" TP 2659,6753.73 r90 top
TP6 "1V0" TP 3327,6741 r90 top
TX "TXSOC" TP 4531.87,7185.68 r90 top (schematic designator TP_M1)
U1 "NS4158" SOIC-8_L4.9-W3.9-P1.27-LS6.0-BL 4047,6760 r0 top
U2 "SSP7615" SOT-23-5 4005,6165 r90 top
U3 "SY7069ADC" SOT-23-6 3564.19,6154.26 r180 top
U4 "FP6185-18S5" SOT23-5P 2858,6948 r90 top
U5 "TMI3408/FP6396A" SOT-23-5 2456,6882 r180 top
U6 "TMI3408/FP6396A" SOT-23-5 3270.83,6217 r270 top
U7 "TMI3411/FP6378A" SOT-23-5 3122.33,6584.83 r270 top
U8 "SSC37X" IC-88P-QFN9X9-P035 3586.02,7603.79 r90 top locked
U9 "W25NO1GVZE1G" SOP8-150+208 3957,7051 r0 top
U10 "TLSR8208B" QFN-24-EP(4*4) 4466.4,6510.5 r0 top
U11 "TP4056X" SOP8-9 2911,6360 r180 top
USB1 "HC-TYPE-C-16P-01A" USB-C-SMD_HC-TYPE-C-16P-01A 2202,6653 r90 bottom locked
Y1 "24MHz +-20PPM" CRYSTAL-SMD_4P-L3.2-W2.5 4715.56,6565.62 r180 top value=13.56MHz
Y2 "24MHz" CRYSTAL-SMD_4P-L3.2-W2.5-BL 4075,7606 r0 top

## Footprints (in the part's own frame and the unit in brackets; to place one, negate y for a bottom-side part, rotate by r counter-clockwise, add the part's x,y. Pads: shape width x height; smd on the part's side, far side on the other; paste and mask are expansions set on the pad)
0402-D [mil]
  rect 19.89x21.68 smd paste-3937.01 mask+2: 1(-19.05,-5.15) 2(13.75,-5.15)
  silkscreen extent -50,-25 33,15
0402_C [mm]
  rect 0.6x0.65 smd: 1(-0.425,0) 2(0.425,0)
  silkscreen extent -0.98,-0.58 0.98,0.58, body extent -0.48,-0.3 0.52,0.3, height 0.2
0402_R [mm]
  rect 0.6x0.65 smd: 1(-0.425,0) 2(0.425,0)
  silkscreen extent -0.97,-0.58 0.97,0.58, body extent -0.57,-0.27 0.58,0.28, height 0.41
0603_C [mm]
  rect 0.93x0.98 smd: 1(-0.77,0) 2(0.77,0)
  silkscreen extent -1.54,-0.79 1.54,0.79, body extent -0.8,-0.4 0.8,0.4, height 0.3
0603_R [mm]
  rect 0.93x0.98 smd: 1(-0.77,0) 2(0.77,0)
  silkscreen extent -1.53,-0.79 1.54,0.79, body extent -0.85,-0.4 0.85,0.4, height 0.56
0805_C [mm]
  rect 1.16x1.47 smd: 1(-0.89,0) 2(0.89,0)
  silkscreen extent -1.77,-1.04 1.77,1.04, body extent -1,-0.62 1,0.63, height 0.77
1206_R [mil]
  rect 47.54x66.97 smd: 1(-64.23,-1.52) 2(52.21,-1.52)
  silkscreen extent -97,-44 85,41
C0402 [mm]
  rect 0.79x0.54 smd: 1(-0.545,0) 2(0.545,0)
  silkscreen extent -1.17,-0.5 1.17,0.5
c0402 [mm]
  rect 0.79x0.54 smd: 1(-0.545,0) 2(0.545,0)
  silkscreen extent -1.17,-0.5 1.17,0.5
C0603 [mm]
  rect 0.8x0.9 smd: 1(-0.7,0) 2(0.7,0)
  silkscreen extent -1.41,-0.71 1.39,0.72
C0805 [mm]
  rect 1.16x1.47 smd: 1(-0.89,0) 2(0.89,0)
  silkscreen extent -1.77,-1.04 1.77,1.04, body extent -1,-0.62 1,0.63, height 0.77
C1206 [mm] "Chip Capacitor; Body 3.2 x 1.6 mm (LxW typ)"
  rect 1.6x1.8 smd: 1(-1.4,0) 2(1.4,0)
  silkscreen extent -0.3,-0.8 0.3,0.8
CONN-SMD_2.0-2PLT [mm]
  rect 1x5.5 smd: 1(0.798,-1.644) 2(-1.202,-1.644)
  rect 1.6x3 smd: 3(3.698,0.406) 4(-4.102,0.406)
  silkscreen extent -4.2,-2.87 3.8,3.48
CONN-SMD_2.0-3PLT [mm]
  rect 1x5.5 smd: 1(2.95,-1.263) 2(0.95,-1.263) 3(-1.05,-1.263)
  rect 1.6x3 smd: 4(-3.95,0.987) 5(5.85,0.987)
  silkscreen extent -4.05,-3.06 5.95,4.44
CONN-SMD_2P-P1.25-LT [mm]
  rect 0.8x1.6 smd paste+0 mask+0.05: 1(-0.625,1.45) 2(0.625,1.45)
  rect 2.1x3 smd paste+0 mask+0.05: 3(-3.175,-1.45) 4(3.175,-1.45)
  silkscreen extent -3.68,-2.55 3.68,1.73
CONN-SMD_4P-P1.25_LT [mm]
  rect 0.6x1.6 smd paste+0.051: 1(-1.875,1.55) 2(-0.625,1.55) 3(0.625,1.55) 4(1.875,1.55)
  rect 2x3 smd paste+0.051: 5(-4.5,-1.55) 6(4.5,-1.55)
  silkscreen extent -5.06,-2.45 5.09,1.7
CRYSTAL-SMD_4P-L3.2-W2.5 [mm]
  rect 1.4x1.2 smd: 1(-1.383,-0.797) 2(0.817,-0.797) 3(0.817,0.903) 4(-1.383,0.903)
  silkscreen extent -2.54,-1.85 1.75,1.73
CRYSTAL-SMD_4P-L3.2-W2.5-BL [mm]
  rect 1.4x1.2 smd: 1(-1.1,-0.85) 2(1.1,-0.85) 3(1.1,0.85) 4(-1.1,0.85)
  silkscreen extent -2.26,-1.91 2.03,1.68
D0402_0.55X0.6 [mm]
  rect 0.55x0.55 smd: 1(-0.425,0) 2(0.425,0)
  silkscreen extent -1.04,-0.52 1.03,0.52
DO-214AC [mm]
  rect 2x2 smd: 1(-2.54,0) 2(2.54,0)
  silkscreen extent -2.25,-1.41 2.25,1.4
F1210 [mm]
  rect 1.485x2.781 smd: 1(-1.6,0) 2(1.6,0)
  silkscreen extent -2.67,-1.65 2.67,1.65
IC-88P-QFN9X9-P035 [mm]
  oval 1.5x0.21 smd: 1(-4.8,3.675) 2(-4.8,3.325) 3(-4.8,2.975) 4(-4.8,2.625) 5(-4.8,2.275) 6(-4.8,1.925) 7(-4.8,1.575) 8(-4.8,1.225) 9(-4.8,0.875) 10(-4.8,0.525) 11(-4.8,0.175) 12(-4.8,-0.175) 13(-4.8,-0.525) 14(-4.8,-0.875) 15(-4.8,-1.225) 16(-4.8,-1.575) 17(-4.8,-1.925) 18(-4.8,-2.275) 19(-4.8,-2.625) 20(-4.8,-2.975) 21(-4.8,-3.325) 22(-4.8,-3.675) 45(4.8,-3.675) 46(4.8,-3.325) 47(4.8,-2.975) 48(4.8,-2.625) 49(4.8,-2.275) 50(4.8,-1.925) 51(4.8,-1.575) 52(4.8,-1.225) 53(4.8,-0.875) 54(4.8,-0.525) 55(4.8,-0.175) 56(4.8,0.175) 57(4.8,0.525) 58(4.8,0.875) 59(4.8,1.225) 60(4.8,1.575) 61(4.8,1.925) 62(4.8,2.275) 63(4.8,2.625) 64(4.8,2.975) 65(4.8,3.325) 66(4.8,3.675)
  oval 0.21x1.5 smd: 23(-3.675,-4.8) 24(-3.325,-4.8) 25(-2.975,-4.8) 26(-2.625,-4.8) 27(-2.275,-4.8) 28(-1.925,-4.8) 29(-1.575,-4.8) 30(-1.225,-4.8) 31(-0.875,-4.8) 32(-0.525,-4.8) 33(-0.175,-4.8) 34(0.175,-4.8) 35(0.525,-4.8) 36(0.875,-4.8) 37(1.225,-4.8) 38(1.575,-4.8) 39(1.925,-4.8) 40(2.275,-4.8) 41(2.625,-4.8) 42(2.975,-4.8) 43(3.325,-4.8) 44(3.675,-4.8) 67(3.675,4.8) 68(3.325,4.8) 69(2.975,4.8) 70(2.625,4.8) 71(2.275,4.8) 72(1.925,4.8) 73(1.575,4.8) 74(1.225,4.8) 75(0.875,4.8) 76(0.525,4.8) 77(0.175,4.8) 78(-0.175,4.8) 79(-0.525,4.8) 80(-0.875,4.8) 81(-1.225,4.8) 82(-1.575,4.8) 83(-1.925,4.8) 84(-2.275,4.8) 85(-2.625,4.8) 86(-2.975,4.8) 87(-3.325,4.8) 88(-3.675,4.8)
  round 4 hole 3: 89(0,0)
  Top Layer region: -3.55,3.85 -3.55,-3.85 3.55,-3.85 3.55,3.85 -3.55,3.85
  silkscreen extent -7.21,-7.01 6.91,6.84
IND-SMD_L3.0-W3.0 [mm]
  rect 1.5x3.32 smd mask+0.102: 1(0.247,0.381) 2(-2.409,0.381)
  silkscreen extent -2.61,-1.52 0.44,2.29
L0603 [mm] "Chip Inductor; Body 1.6 x 0.8 mm (LxW typ)"
  rect 0.9x0.8 smd: 1(-0.7,0) 2(0.7,0)
  silkscreen extent -1.45,-0.3 -1.45,0.3
L0805 [mil]
  rect 44.59x54.21 smd: 1(-38.04,0) 2(38.04,0)
  silkscreen extent -77,-40 73,40
L1206 [mm]
  rect 1.485x1.728 smd: 1(-1.593,0) 2(1.593,0)
  silkscreen extent -2.56,-1.09 2.56,1.09
L-MLPS-4018 [mm]
  rect 4.4x1.3 smd: 1(0,-1.55) 2(0,1.55)
  silkscreen extent -2.1,-0.75 2.1,0.75
LED-ARRAY-SMD_4P-L3.2-W2.8-LS3.5-BL_XL-A3528RGBC-BM [mm]
  rect 1.3x0.82 smd paste+0 mask+0.05: 1(-1.55,-0.7) 2(-1.55,0.7) 3(1.55,-0.7) 4(1.55,0.7)
  silkscreen extent -1.6,-1.4 1.6,1.4
LED-SMD_4P-L3.2-W1.6-TL_XL-3216SURUGC [mm]
  rect 0.9x0.7 smd paste+0.051: 1(-1.2,0.5) 2(1.2,0.5) 3(-1.2,-0.5) 4(1.2,-0.5)
  silkscreen extent -2.33,-0.89 2.3,0.89
QFN-24-EP(4*4) [mil]
  rect 24.9x11 smd paste-3937 mask+2: 1(-75.8,47.9) 2(-75.8,28.3) 3(-75.8,8.6) 4(-75.8,-11.1) 5(-75.8,-30.8) 6(-75.8,-50.5) 13(74.7,-50.5) 14(74.7,-30.8) 15(74.7,-11.1) 16(74.7,8.6) 17(74.7,28.3) 18(74.7,47.9)
  rect 11x24.9 smd paste-3937 mask+2: 7(-49.7,-76.5) 8(-30.1,-76.5) 9(-10.4,-76.5) 10(9.3,-76.5) 11(29,-76.5) 12(48.7,-76.5) 19(48.7,74) 20(29,74) 21(9.3,74) 22(-10.4,74) 23(-30.1,74) 24(-49.7,74)
  rect 106.3x106.3 smd paste-3937 mask+2: 25(-0.5,-1.3)
  silkscreen extent -96,-83 81,80
R0402 [mm]
  rect 0.55x0.55 smd mask+0.025: 1(-0.508,0) 2(0.508,0)
  silkscreen extent -0.89,-0.38 0.89,0.38
R0603 [mil]
  rect 31.75x34.02 smd: 1(-29.66,0) 2(29.66,0)
  silkscreen extent -55,-26 55,26
R1210 [mil]
  rect 47x118 smd: 1(-55,0) 2(55,0)
  silkscreen extent -87,-67 87,67
"SIP4 2.0" [mm]
  round 1.2 hole 0.8: 1(1.194,-0.533) 2(3.194,-0.533) 3(5.194,-0.533) 4(7.194,-0.533)
  silkscreen extent 0,-1.78 8.38,0.66
SIP4-2.54 [mm]
  rect 1.6x1.6 hole 0.9: 1(0,0)
  round 1.6 hole 0.9: 2(2.54,0) 3(5.08,0) 4(7.62,0)
  silkscreen extent -1.27,-1.27 8.89,1.27
SMA [mm]
  rect 1.65x1.53 smd: 1(1.449,-0.076) 2(-2.665,-0.102)
  silkscreen extent -4.16,-1.47 2.8,1.32, body extent -3.06,-1.39 1.84,1.18, height 2.39
"SMD 6.3*5.4 电解" [mm]
  rect 3.5x1.2 smd: 1(-2.822,0.023) 2(2.518,0.023)
  silkscreen extent -3.53,-3.35 3.22,3.4
SMD-KEY-3 [mil]
  rect 35.4x82.7 smd paste-3937 mask+2: 1(-44.1,55.5) 2(74,55.5)
  round 63 hole 43.3 paste+0 mask+2: 3(14.9,-44.9)
  silkscreen extent -74,-232 104,55
SOD-123 [mm]
  rect 0.88x0.99 smd: 1(1.209,-0.15) 2(-2.176,-0.15)
  silkscreen extent -2.12,-1.09 0.92,0.79
SOD-523_L1.2-W0.8-LS1.6-BI [mm]
  rect 0.6x0.4 smd: 1(-0.75,0) 2(0.75,0)
  silkscreen extent -0.65,-0.5 0.65,0.5
SOIC-8_L4.9-W3.9-P1.27-LS6.0-BL [mm]
  oval 0.588x2.045 smd: 1(-1.905,-2.772) 2(-0.635,-2.772) 3(0.635,-2.772) 4(1.905,-2.772) 5(1.905,2.772) 6(0.635,2.772) 7(-0.635,2.772) 8(-1.905,2.772)
  silkscreen extent -2.8,-2.92 2.53,1.52
SOP8-9 [mil]
  oval 24x66.93 smd: 1(-75,-110) 2(-25,-110) 3(25,-110) 4(75,-110) 5(75,110) 6(25,110) 7(-25,110) 8(-75,110)
  rect 90.55x90.55 smd: 9(0,0)
  silkscreen extent -100,-50 100,50, body extent -100,-119 98,119, height 63
SOP8-150+208 [mm]
  rect 2.2x0.6 smd: 1(-3.65,1.905) 2(-3.65,0.635) 3(-3.65,-0.635) 4(-3.65,-1.905) 5(3.65,-1.905) 6(3.65,-0.635) 7(3.65,0.635) 8(3.65,1.905)
  rect 3x4 smd: 9(0,0)
  silkscreen extent -5.32,-2.64 3.95,2.64
SOT23-5P [mil]
  rect 20x50 smd: 1(37.5,50) 2(0,50) 3(-37.5,50) 4(-37.5,-50) 5(37.5,-50)
  silkscreen extent -65,-60 68,75
SOT-23 [mm]
  rect 1.07x0.6 smd: 1(0.719,-1.166) 2(0.719,0.734) 3(-1.751,-0.216)
  silkscreen extent -1.39,-1.75 0.36,1.32
SOT-23(SOT-23-3) [mm]
  rect 1.25x0.7 smd: 1(1.25,-0.95) 2(1.25,0.95) 3(-1.25,0)
  silkscreen extent -0.65,-1.46 0.9,1.46, body extent -1.5,-1.5 1.5,1.5, height 1.3
SOT-23-5 [mm]
  rect 1.2x0.6 smd paste+0 mask+0.05: 1(-1.325,0.51) 2(-1.325,-0.44) 3(-1.325,-1.39) 4(0.975,-1.39) 5(0.975,0.51)
  silkscreen extent -1.85,-1.94 0.67,1.32
SOT-23-6 [mil]
  rect 20.95x42.2 smd mask+2: 1(-24.81,-10.16) 2(12.59,-10.16) 3(49.99,-10.16) 4(49.99,80.32) 5(12.59,80.32) 6(-24.81,80.32)
  silkscreen extent -59,-22 73,70
SWPA3015S [mm]
  rect 1x2.7 smd: 1(-1.2,0) 2(1.2,0)
  silkscreen extent -1.8,-1.55 1.8,1.55
TP [mm]
  round 1.2 smd: 1(-0.013,-0.003)
USB-C-SMD_HC-TYPE-C-16P-01A [mm]
  oval 1x2.1 hole 0.6 slot 1.7 at 90 deg: 1(-4.32,1.77) 2(4.32,1.77)
  oval 1x1.6 hole 0.6 slot 1.2 at 90 deg: 3(4.32,-2.41) 4(-4.32,-2.41)
  rect 0.6x1.3 smd: A1B12(-3.2,2.41) A4B9(-2.4,2.41) B1A12(3.2,2.41) B4A9(2.4,2.41)
  rect 0.3x1.3 smd: A5(-1.25,2.41) A6(-0.25,2.41) A7(0.25,2.41) A8(1.25,2.41) B5(1.75,2.41) B6(0.75,2.41) B7(-0.75,2.41) B8(-1.75,2.41)
  Keep-Out Layer board cut-out: 2.89,0.938 2.763,0.964 2.656,1.035 2.584,1.143 2.559,1.27 2.584,1.397 2.656,1.504 2.763,1.576 2.89,1.601 2.89,1.601 3.017,1.576 3.124,1.504 3.196,1.397 3.221,1.27 3.196,1.143 3.124,1.035 3.017,0.964 2.89,0.938
  Keep-Out Layer board cut-out: -2.89,0.939 -3.017,0.964 -3.124,1.036 -3.196,1.143 -3.221,1.27 -3.196,1.397 -3.124,1.504 -3.017,1.576 -2.89,1.601 -2.89,1.601 -2.763,1.576 -2.656,1.504 -2.584,1.397 -2.559,1.27 -2.584,1.143 -2.656,1.036 -2.763,0.964 -2.89,0.939
  Keep-Out Layer circle w0.005: c2.89,1.27 r0.325
  Keep-Out Layer circle w0.005: c-2.89,1.27 r0.325
  Keep-Out Layer region: 2.89,0.938 2.763,0.964 2.656,1.035 2.584,1.143 2.559,1.27 2.584,1.397 2.656,1.504 2.763,1.576 2.89,1.601 2.89,1.601 3.017,1.576 3.124,1.504 3.196,1.397 3.221,1.27 3.196,1.143 3.124,1.035 3.017,0.964 2.89,0.938
  Keep-Out Layer region: -2.89,0.939 -3.017,0.964 -3.124,1.036 -3.196,1.143 -3.221,1.27 -3.196,1.397 -3.124,1.504 -3.017,1.576 -2.89,1.601 -2.89,1.601 -2.763,1.576 -2.656,1.504 -2.584,1.397 -2.559,1.27 -2.584,1.143 -2.656,1.036 -2.763,0.964 -2.89,0.939
  silkscreen extent -4.5,-5.01 4.5,0.51

## Part data
1V5 1V8 3V3_BLE RX TP2 TP4 TP6 TX: library part "T POINT R"
3V3: library part HEADER_1x4-2mm_1
C1: library part "CAP POL"
C2 C4 C5 C6 C50 C63 C64 C65 C66 C67 C68 C69 C70 C71 C72 C73 C76 C77 C78 C79 C80 C83 C84 C85 C86 C87 C89 C90 C91 C93 C94 C95 C96 C98 C99 C106: library part C0805_10uF, Class=DISCRETE
C3 C7 C97 C102: library part C0402, Class=DISCRETE
  C97: BOM="CAP: 4.7uF, 0603"
C8 C9 C10 C11 C12 C14: library part CAP_0805, Add into BOM=yes, Convert to PCB=yes, Device=CAP_0805, Supplier Footprint=0805, Symbol=CapAcitance
C13: library part CAP_1206, Add into BOM=yes, Convert to PCB=yes, Device=CAP_1206, Supplier Footprint=1206, Symbol=CapAcitance
C15: library part Cap1, "无极电容"
C16 C103: library part Cap, "Capacitor", Published=8-Jun-2000, Publisher="Altium Limited", Revision="July-2002: Re-released for DXP Platform."
C17 C18 C19 C20 C21 C22 C23 C29 C30 C31: library part CAP, "Capacitor"
C24 C25 C26 C27 C104 C105: library part CAP
C28: library part RVT1A221M0605_C72494, Equivalent Series Resistance(ESR)=-, JLCPCB Part Class="Extended Part", Manufacturer Part=RVT1A221M0605, Rated Voltage=10V, Ripple Current=90mA@120Hz, =6.3mm, Add into BOM=yes, Convert to PCB=yes, Datasheet=https://atta.szlcsc.com/upload/public/pdf/source/20170325/1490427950282.pdf, Device=RVT1A221M0605_C72494, L=5.4mm, Supplier=LCSC, Supplier Footprint=SMD,D6.3xL5.4mm, Supplier Part=C72494, Symbol=RVT1A221M0605-C72494
C32 C33 CNC1: library part CAP_0603, Add into BOM=yes, Convert to PCB=yes, Device=CAP_0603, Supplier Footprint=0603, Symbol=CapAcitance
C34 C35 C36 C37 C38 C39 C40 C41 C43 C44 C45 C48 C49 C51 C52 C53 C54 C55 C56 C57 C58 C59 C62 C74 C75 C81 C82 C88 C92 C101: library part C0402/100nF/10V/X7R, "[ 100nF(0.1uF),10V,X7R ](0402)", Part Name=0402B104K100C, Brand=Walsin地?, Class=Capacitor, Creator=Alan.Liu#6135/0920796617
C42 C46 C47 C60 C61 C100: library part "CAP NP2"
CON3: Current Rating (Max)=2A, JLCPCB Part Class="Extended Part", Add into BOM=yes, Comment_1=BX-PH2.0-3PZZ, Convert to PCB=yes, Datasheet=https://atta.szlcsc.com/upload/public/pdf/source/20231017/78B49E88B01779D5C268ECAB29020769.pdf, Device=BX-PH2.0-3PZZ, LCSC Part Name=BX-PH2.0-3PZZ, Manufacturer Part=BX-PH2.0-3PZZ, Number of Pins=3P, Number of PINs Per Row=3, Number of Rows=1, Pins Structure=1x3P, Pitch=2mm, Reference Series=PH, Row Spacing=-, Supplier=LCSC, Supplier Part=C18077745, Symbol=BX-PH2.0-3PZZ
CON4: library part HC-1.25-4PLT, Symbol=HC-1.25-4PLT
D1 D2: library part DIODE_Dup1
D3: library part TPNSR05F20NXT5G, Symbol=TPNSR05F20NXT5G
D4 D5 D9 D10: Breakdown Voltage=5.6V, Maximum Clamping Voltage=18.6V, Peak Pulse Current (Ipp)@10/1000us=9.4A, Reverse Stand-Off Voltage (Vrwm)=5V, Add into BOM=yes, Convert to PCB=yes, Datasheet=https://atta.szlcsc.com/upload/public/pdf/source/20171026/C136167_15089841930291059137.pdf, Device=LESD5Z5.0CT1G, Manufacturer Part=LESD5Z5.0CT1G, Supplier=LCSC, Supplier Footprint=SOD-523, Supplier Part=C136167, Symbol=LESD5Z5.0CT1G, Type=ESD
D6: library part DIODE
D7: library part SMF6.0A_C19077499, Breakdown Voltage=6.67V, JLCPCB Part Class="Extended Part", Maximum Clamping Voltage=10.3V, Peak Pulse Current (Ipp)@10/1000us=19.4A, Peak Pulse Power Dissipation (Ppp)@10/1000us=200W, Reverse Leakage Current (Ir)=400uA, Reverse Stand-Off Voltage (Vrwm)=6V, Add into BOM=yes, Convert to PCB=yes, Datasheet=https://atta.szlcsc.com/upload/public/pdf/source/20231201/BA209EB353689BD2A9785188AB9E10B0.pdf, Device=SMF6.0A_C19077499, LCSC Part Name=SMF6.0A, Manufacturer Part=SMF6.0A, Supplier=LCSC, Supplier Footprint=SOD-123FL, Supplier Part=C19077499, Symbol=SMF6.0A_C19077499, Type=TVS
D8: library part "Diode 1N4148", "High Conductance Fast Diode", Code_JEDEC=DO-204-AH, ComponentLink1Description="Manufacturer Link", ComponentLink1URL=http://www.fairchildsemi.com/, ComponentLink2Description=Datasheet, ComponentLink2URL=http://www.fairchildsemi.com/ds/1N%2F1N4148.pdf, DatasheetVersion=1997, LatestRevisionDate=17-Jul-2002, LatestRevisionNote="Re-released for DXP Platform.", PackageDescription="Diode, Axial; Body 3.8 x 1.9 mm (LxDia. max), Lead Dia. 0.53 mm (max)", PackageReference=DO-35, Published=8-Jun-2000, Publisher="Altium Limited"
F1: library part SMD1210B150TFT, Current Rating (Max)=100A, Hold Current=1.5A, Manufacturer Part="6V   2A", Operating Voltage (Max)=6V, Power Dissipation=800mW, Trip Current=3A, Add into BOM=yes, Convert to PCB=yes, Datasheet=https://atta.szlcsc.com/upload/public/pdf/source/20190124/C269169_A54EAE2455D8E3AD9881401F59298F09.pdf, Device=SMD1210B150TFT, Maximum Time to Trip=300ms, Supplier=LCSC, Supplier Footprint=1210, Supplier Part=C269165, Symbol=SMD1210B150TFT
FB1 FB2: library part BEAD, "BEAD/0402/120ohm/200MA", C1_Manu=SMT, C2_Type=BEAD, C3_Pkg=0402, C4_Unit=R, C5_Val=120, Class=DISCRETE, Fanvil_ID=INT.1013, Fanvil_Spec=0402-600Ω&100M/100mA/FBMA-11-100505-601T, Fanvil_Type=磁?, Part_Number=49223, Part_Type=0402贴片
FB3 FB4: library part SMD_BEAD_FB0603, Current=2A
KEY RESET: library part K2-1109SE-I4SW-04, Symbol=K2-1109SE-I4SW-04
L1: library part CBW321609U601T, Current Rating=2A, Add into BOM=yes, Circuits=1, Convert to PCB=yes, Datasheet=https://atta.szlcsc.com/upload/public/pdf/source/20190129/C361676_507080CDC8DBC2B0B7C2139C1873642D.pdf, Device=CBW321609U601T, Manufacturer Part=600R, Supplier=LCSC, Supplier Footprint=1206, Supplier Part=C73732, Symbol=CBW321609U601T
L2 L3: library part SBK201209T-102Y-N, Current Rating=200mA, Add into BOM=yes, Circuits=1, Convert to PCB=yes, Datasheet=https://atta.szlcsc.com/upload/public/pdf/source/20181119/C285644_F4950E68CEB7BD9E18B05382B5272067.pdf, Device=SBK201209T-102Y-N, Supplier=LCSC, Supplier Footprint=0805, Supplier Part=C142036, Symbol=SBK201209T-102Y-N
  L2: Manufacturer Part=SBK201209T-102Y-N
  L3: Manufacturer Part="1K 0.5A"
L4 L5 L6: library part INDUCTOR
L7: library part SLW3012P1R5MST, Symbol=SLW3012P1R5MST
L8 L9 L10: library part CHOKE_4.7uH/4.1A-L8.0W8.0H4.0, "[ 4.7uH/4100mA ]; Inductance:4.7uH+-30%;Rated Current:4100mA;Self-resonant Frequency:30MHz;DC.Resistance:0.018R+-30%;", Part Name=NR8040T4R7N, Brand="TAIYO YUDENび锭", Class=Choke, Creator=Alan.Liu#6135/0920796617
L11: library part L0603, Class=DISCRETE
MIC SPK: library part HC-1.25-2PLT, Current Rating (Max)=2A, JLCPCB Part Class="Extended Part", Add into BOM=yes, Convert to PCB=yes, Datasheet=https://atta.szlcsc.com/upload/public/pdf/source/20230707/8E5913B5A3195C18F5EE12EA4CB86B82.pdf, Device=HC-1.25-2PLT, Manufacturer Part=HC-1.25-2PLT, Number of Pins=2P, Number of PINs Per Row=2, Number of Rows=1, Pins Structure=1x2P, Pitch=1.25mm, Reference Series=-, Row Spacing=-, Supplier=LCSC, Supplier Footprint=SMD,P=1.25mm, Supplier Part=C2845388, Symbol=HC-1.25-2PLT
P1: library part "Header 4", "Header, 4-Pin", LatestRevisionDate=17-Jul-2002, LatestRevisionNote="Re-released for DXP Platform.", Publisher="Altium Limited"
Q1 Q2 Q6: library part JMTL3400A, BOM_JLCPCB Part Class="Extended Part", BOM_Manufacturer Part=JMTL3400A, BOM_Supplier=LCSC, BOM_Supplier Part=C2890442, Contributor=LCSC, spicePre=Q, spiceSymbolName=JMTL3400A
Q3: library part NPN_sot23, "NPN三极管"
Q4: library part AO3400_SOT23, BOM="N-Channel EMFET 2N7002 SOT23 <FAIRCHILD>", COST(NT$)=4.69
Q5: BOM_JLCPCB Part Class="Extended Part", BOM_Manufacturer=CJ, BOM_Manufacturer Part=CJ3401, BOM_Supplier=LCSC, BOM_Supplier Part=C13799, spicePre=Q, spiceSymbolName=CJ3401
R1 R2 R32 R34 R35 R36 R39 R41 R42 R44 R45 R46 R48 R49 R53 R55 R56 R57 R59 R61 R63 R65 R69 R83 R84 R85 R86 R87 R88: library part R-PIN-Mark
R3 R90: library part R0402, Class=DISCRETE
R4 R5: library part Res_0805, Add into BOM=yes, Convert to PCB=yes, Device=Res_0805, Supplier Footprint=0805
R6 R16 R18 R19 R20 R23 R75: library part Res2, "Resistor", LatestRevisionDate=17-Jul-2002, LatestRevisionNote="Re-released for DXP Platform.", PackageReference=AXIAL-0.4, Published=8-Jun-2000, Publisher="Altium Limited"
R7 R11 R28 R29 R30 R31 R33 R37 R38 R40 R43 R47 R54 R67 R68 R70 R80 R82: library part R_Dup2
R8 R9 R10 R12 R24 R25 R26 R71 R73 R76 R77 RNC1: library part Res_0603, Add into BOM=yes, Convert to PCB=yes, Device=Res_0603, Supplier Footprint=0603
R13 R14 R15 R17 R21 R22 R50 R51 R52 R72 R74: library part RES
R27 R58 R60 R62 R64 R66 R81: library part R_Dup1
R78 R79: library part Res1, "贴片电阻"
R89: library part "R0402_330R 5%", "[ 330R +-5% ](0402); NPO", Part Name=CR0402J330RQ10, Brand="EVER OHMSぱ?", Class=Resistor, Creator=Alan.Liu#6135/0920796617
RG: library part TJ-S2012SW8TCGLC2R2G-A5, Symbol=TJ-S2012SW8TCGLC2R2G-A5
U2: library part SSP7615-33M5R, Symbol=SSP7615-33M5R
U4: library part ADP1610_7
U5 U6: library part LDO,iD9306-AD,300mA_3, "iD9306-AD", Part Number=300035100G, Specification=SOT23,1.8V,ROHS
U7: library part LDO,iD9306-AD,300mA_4, "iD9306-AD", Part Number=300035100G, Specification=SOT23,1.8V,ROHS
U8: library part QFN_88P_20_2
U9: library part 24C08_3
U11: library part TP4056, "TP4056"
USB1: Current Rating - Power (Max)=5A, Add into BOM=yes, Connector Type=Type-C, Convert to PCB=yes, Datasheet=https://atta.szlcsc.com/upload/public/pdf/source/20221116/CF1C0058359F0761D6F7BB69303000BD.pdf, Device=HC-TYPE-C-16P-01A, Manufacturer Part=HC-TYPE-C-16P-01A, Number of Contacts=16P, Number of Ports=1, Standard=-, Supplier=LCSC, Supplier Footprint=SMD, Supplier Part=C2894897, Symbol=HC-TYPE-C-16P-01A
Y1: library part TAXM13.56M4RLBCCT2T, External load capacitor=20pF, JLCPCB Part Class="Extended Part", Add into BOM=yes, Convert to PCB=yes, Datasheet=https://atta.szlcsc.com/upload/public/pdf/source/20171225/C164051_15141924799131203407.pdf, Device=TAXM13.56M4RLBCCT2T, Manufacturer Part=TAXM13.56M4RLBCCT2T, Name=13.56MHz, Supplier=LCSC, Supplier Footprint=SMD3225-4P, Supplier Part=C164051
Y2: library part OSC-20MHz_HALF_4, BOM="DIP-OSC 20MHz  HALF <TXC>", Class=IC
RGB: Symbol=XL-A3528RGBC-BM
U1: Add into BOM=yes, Convert to PCB=yes, Datasheet=https://atta.szlcsc.com/upload/public/pdf/source/20210826/9C0306C24076E9EB95F6FF2952664B70.pdf, Device=NS4158, LCSC Part Name=NS4158, Manufacturer Part=NS4158, Supplier=LCSC, Supplier Footprint=SOIC-8, Supplier Part=C2890042, Symbol=NS4158
U3: Symbol=SY7069ADC

## Via types
v1: diameter 20, hole 12, Top Layer to Bottom Layer, tented both sides, 642 vias

## Nets (pads, with @x,y where several pads share a name; then routed paths per layer and width w, separated by ;. In a path a pad name is that pad's centre, name@x,y a point inside that pad or via, vN(x,y) a via of type N, cw(c..) or ccw(c..) an arc to the next point about the centre after c; other vN are vias at no path point)
1V0: C74.2 C75.2 C76.1 C77.1 C78.1 C79.1 C81.2 C82.2 C83.1 C84.1 C85.1 R40.2 U8.8 U8.12 U8.15 U8.46 U8.66 U8.67 U8.68 U8.76 | length 1420.6
  Top Layer w6: v1(3336,7605.15) 3355.3,7624.46 U8.76@3397.05,7624.46 ; v1(3393,7843) 3393,7794 3384,7785 3374,7785 3352,7763 3352,7742 3359.31,7734.69 U8.68@3397.05,7734.69 ; U8.67@3397.05,7748.47 3397.05,7779.04 3412,7793.99 3412,7825 v1(3424,7837) ; U8.66@3441.34,7792.76 3441.34,7829.93 3455.41,7844 v1(3471,7844) ; U8.8@3537.8,7414.81 3537.8,7353.2 v1(3544,7347) ; U8.12@3592.91,7414.81 3592.91,7358.09 3606.69,7344.31 v1(3606.69,7340) 3606.69,7342.31 v1@3602,7347 ; v1(3629,7354) 3634.25,7359.25 U8.15@3634.25,7414.81 ; U8.46@3716.93,7792.76 v1(3716.93,7847)
  Bottom Layer w6: v1(3336,7605.15) 3355.85,7625 C77.1@3357,7625 ; C81.2@3501,7759.93 3501,7833 v1(3509,7841) ; C85.1@3518,7310 3518,7320.41 3544.59,7347 v1(3544,7347)
  Bottom Layer w8: C84.1@3550.54,7752 3550.54,7835.54 v1(3559,7844)
  Bottom Layer w15: C83.1@3386,7752 3493.07,7752 3550.54,7752 3568,7752 3610,7794 3628,7794 3648.46,7814.46 3677,7814.46 3708.54,7814.46 C76.1@3727,7796 ; C85.1@3518,7310 3517,7309 3517,7308 3517,7271 3517,7252.19 3518.57,7252.19 3535.46,7235.29 C74.2@3535.46,7221
  other v1: 3630,6769 3671,6770 3628,6824 3669,6825
1V5: 1V5.1 C48.2 C49.2 C50.1 L9.2 R29.1 R35.1 | length 701.1
  Top Layer w15: L9.2@3158,6452.24 3254.76,6452.24 3266,6441 C48.2@3266,6377.46 3266,6376 3267,6375 C49.2@3326,6375 ; C49.2@3325,6378 3330,6373 C50.1@3376,6373 3405,6373 3432,6346 R29.1@3483,6346 ; R35.1@3388,6253 3404.5,6269.5 3418,6269.5 ; 1V5.1@3399.48,6157 3418,6175.52 3418,6269.5 ; R29.1@3500,6346 R29.1@3483,6346 ; 3418,6269.5 3431.91,6269.5 3462.34,6299.94 3473,6299.94 3473,6336 R29.1@3483,6346
1V5_NORMAL: C92.2 C93.1 C94.1 C95.1 C96.1 R29.2 R33.1 U8.6 U8.7 U8.9 U8.10 U8.18 | length 1541.7
  Top Layer w6: U8.6@3510.24,7414.81 3510.24,7327.86 3524.02,7314.08 ; U8.7@3524.02,7414.81 3524.02,7314.08 ; U8.9@3551.57,7414.81 3551.57,7363.47 3555.35,7359.69 3565.35,7359.69 ; U8.10@3565.35,7414.81 3565.35,7359.69 ; v1(3603,7222) 3616.65,7222 3617.65,7221 3618.65,7222 ; v1(3648,7232) 3670.54,7232 3691,7252.46 3691,7323.54 3675.59,7338.95 U8.18@3675.59,7414.81 ; 3524.02,7314.08 3524.02,7313.98 3532,7306 3532,7273.04 3586.02,7219.02 3600.65,7219.02 3572,7247.67 3572,7306.35 3565.35,7313 3565.35,7359.69
  Top Layer w15: R33.1@3361,6455 3499,6455 R29.2@3500,6456
  Bottom Layer w10: v1(3600,7194.16) 3610.16,7194.16 v1(3648,7232) ; v1(3603,7222) 3616.37,7222 3627,7232.63 3627,7229.21 ; C96.1@3625,7387.81 3679.19,7387.81 3696.68,7370.31 3696.68,7258.65 3670.04,7232 v1(3648,7232) ; v1(3627,7212.76) 3627,7229.21 ; 3627,7229.21 3629.79,7232 v1(3648,7232)
  Bottom Layer w15: C92.2@3470,7375.35 3480.15,7385.5 3520,7385.5 C93.1@3520,7386.35 3520,7387.81 C96.1@3625,7387.81
  other v1: 3550,6410 3454,6411.31 3486,6411 3520,6411
1V8_NORMAL: C36.2 R27.2 | length 50.8
  Top Layer w15: C36.2@3002,6967 3002,7015 R27.2@3004,7017
3V3: C39.2 C40.2 C41.2 C45.2 C46.1 C47.1 L8.2 R28.1 R31.1 R34.1 TP4.1 | length 700.1
  Top Layer w15: R28.1@2546,7214 2580.51,7214 2607.31,7187.19 2607.31,7114.98 R31.1@2607.32,7079.98 2607.31,6969.98 C40.2@2608.31,6968.98 ; C39.2@2609.31,7042.98 2655.06,7042.98 C46.1@2664.32,7033.72 ; TP4.1@2659,6753.73 2684,6778.73 L8.2@2684,6859 2684,6939 2675,6948 R34.1@2675,6970 2675,7023.04 C46.1@2664.32,7033.72 ; C47.1@2715.32,7031.98 2713.57,7033.72 C46.1@2664.32,7033.72